# EAGLE board ProtoSnap-Pro_Mini-Panel-v15 (EAGLE 6.5.0), part 1 of 3
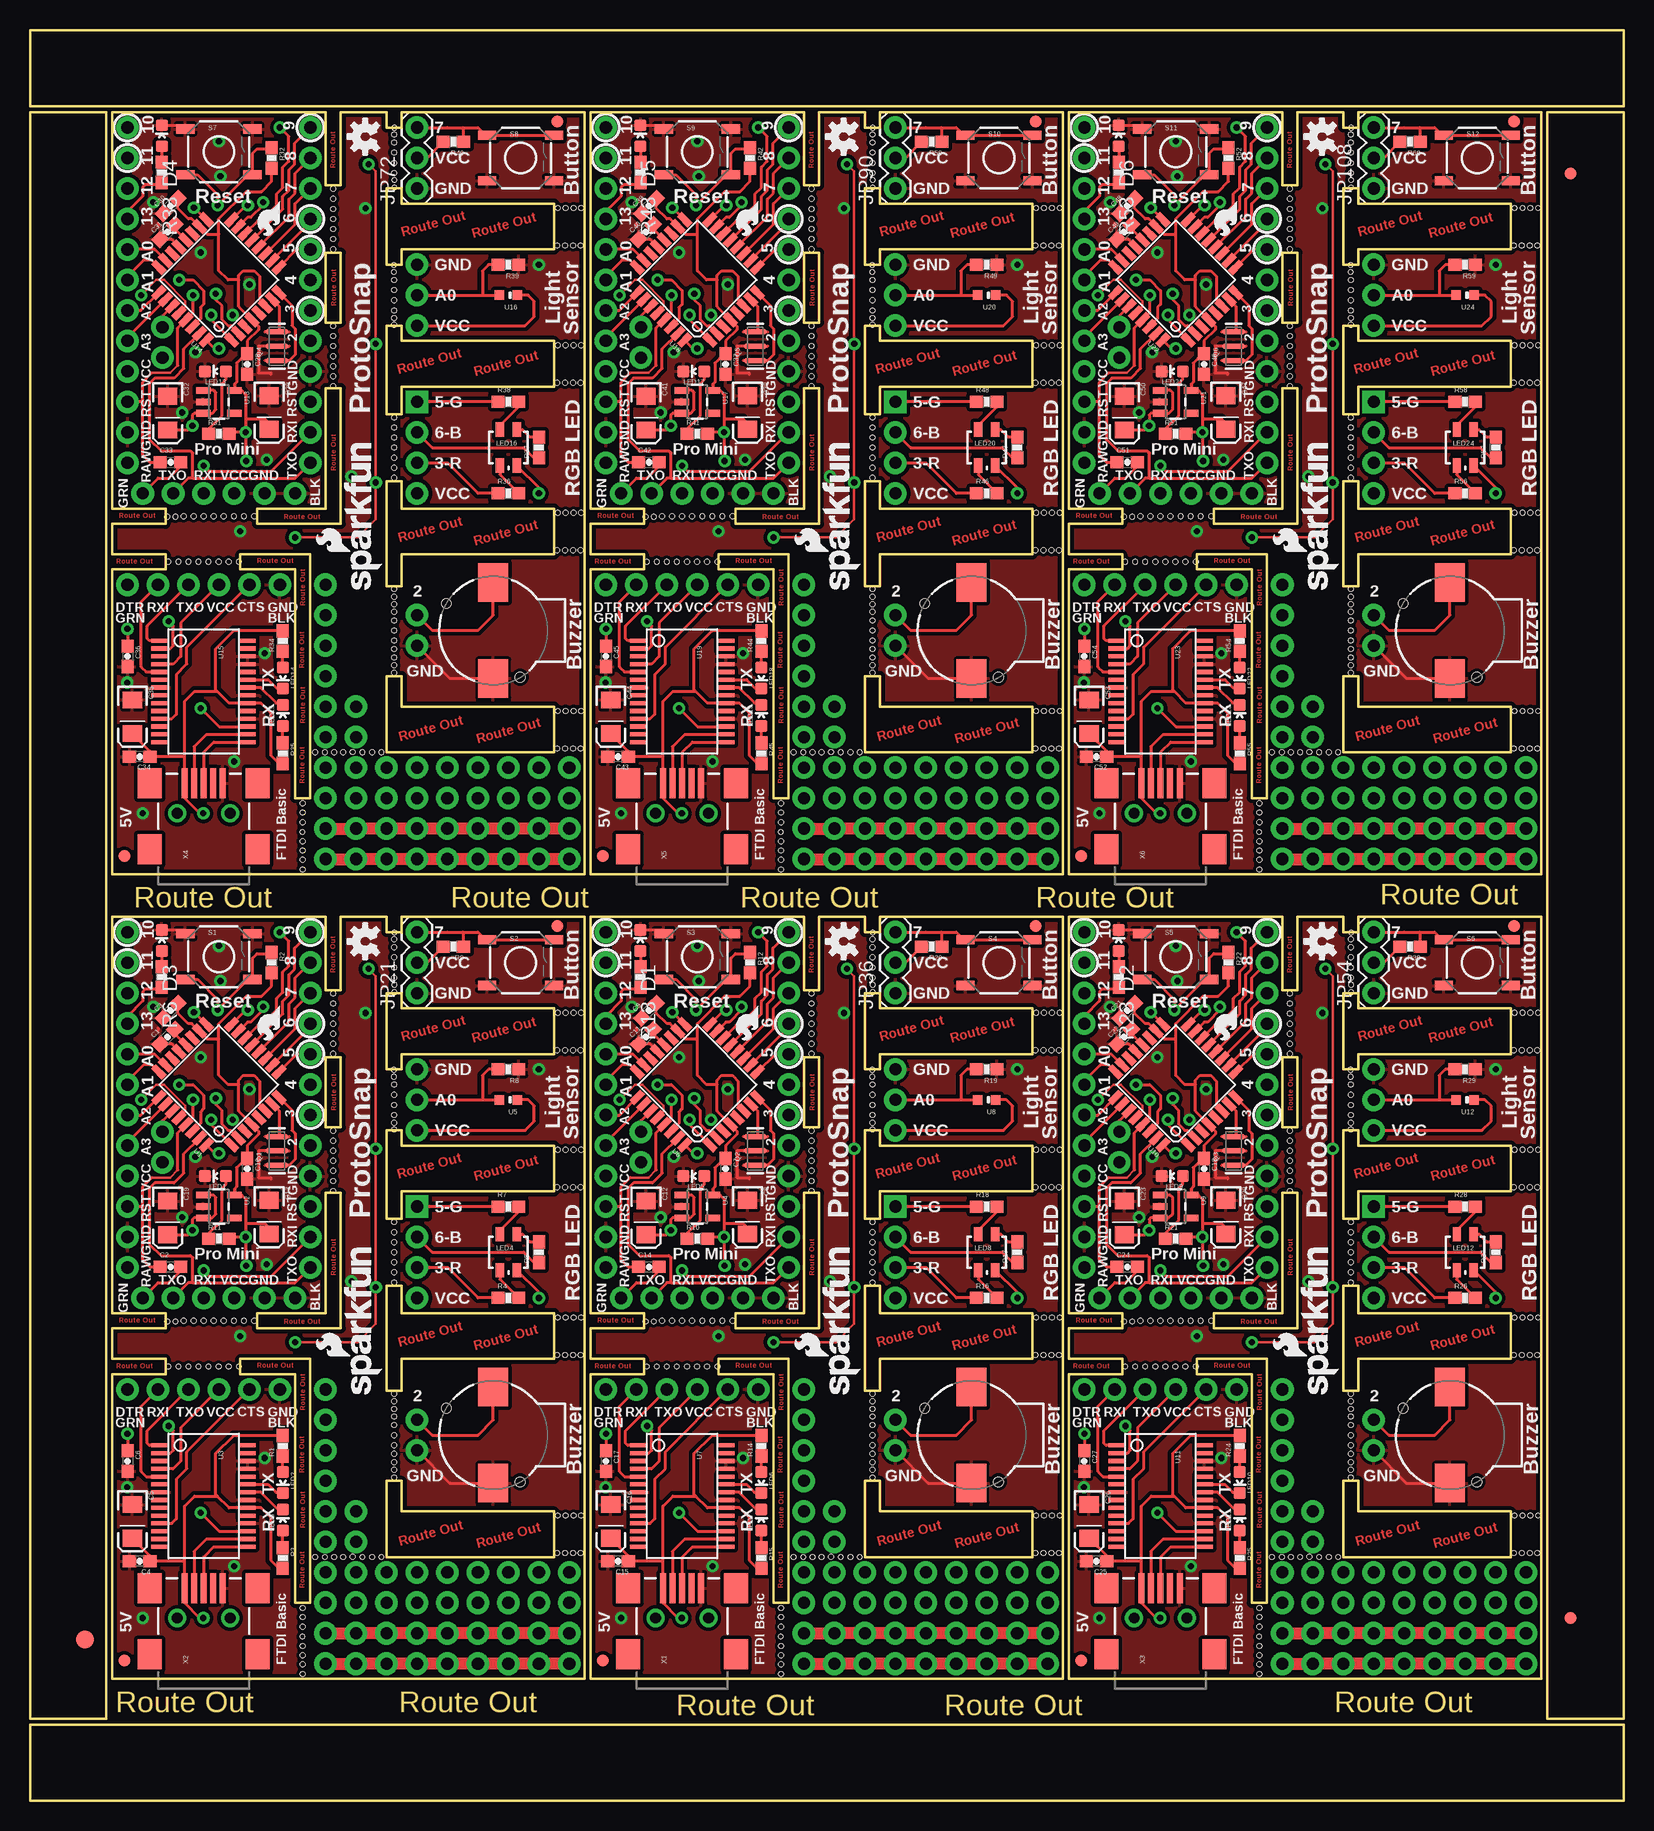
[diagram p0: board, top side]
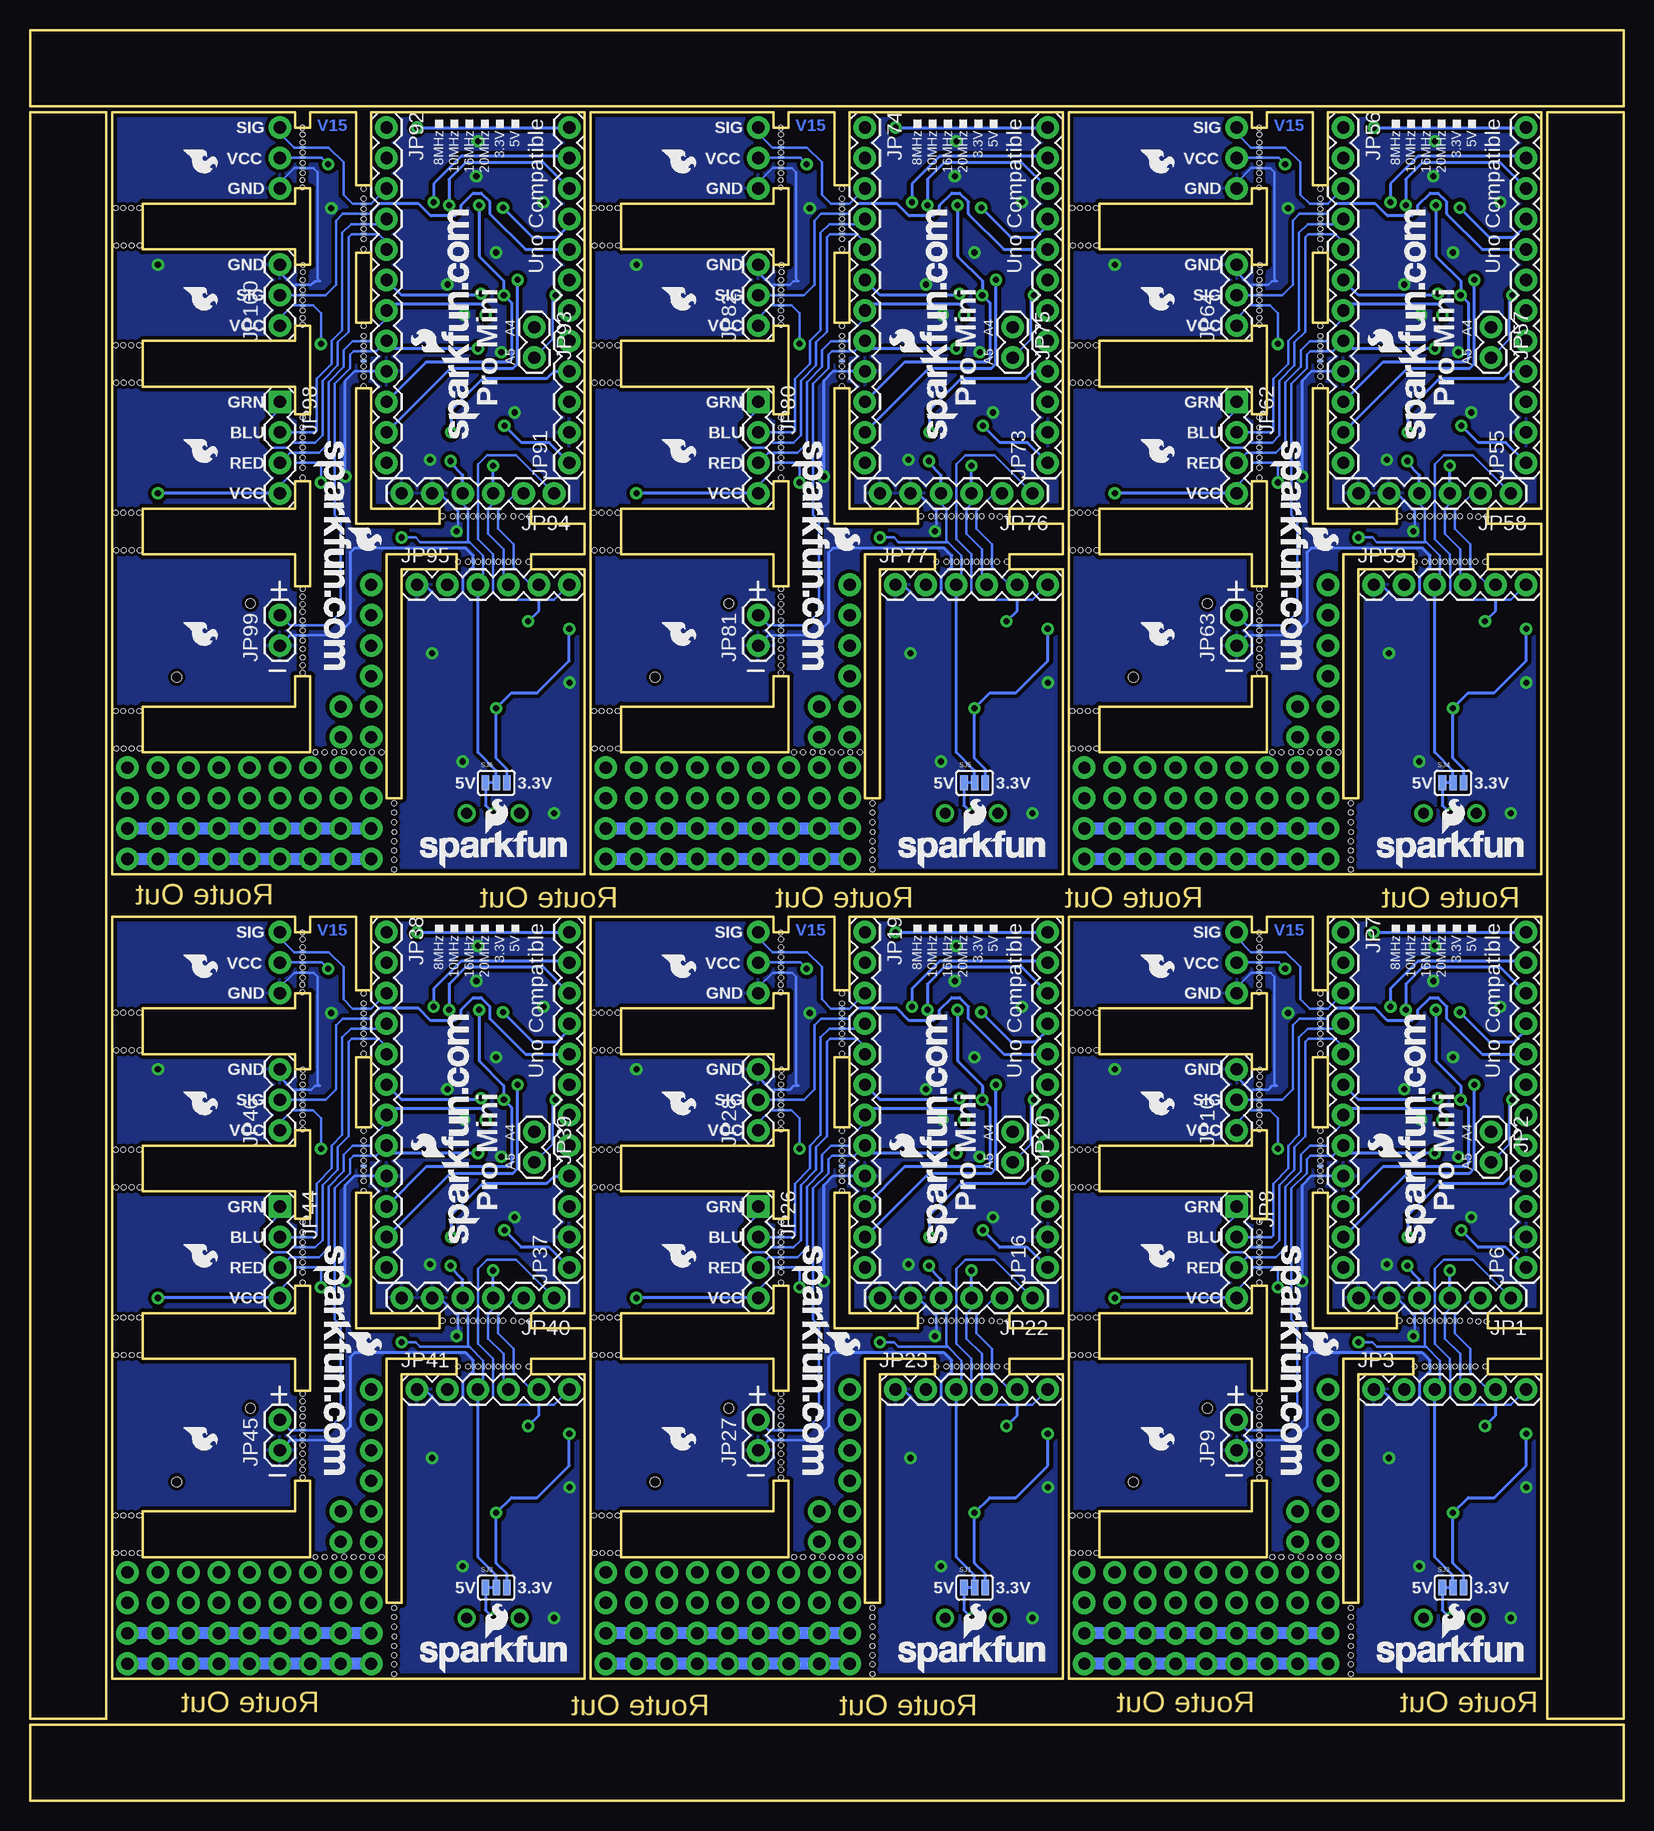
[diagram p1: board, bottom side, seen from below]

Size 132.84 x 147.57 mm. Coordinates in mm from the lower left corner, seen from the top.
Outline: 412 segments
Copper layers (1*16): Top 0.035mm / dielectric 1.5mm / Bottom 0.035mm
Design rules "SparkFun *": minimum track width 8mil, minimum drill 20mil, track to track 8mil, track to pad 8mil, pad to pad 8mil, via to via 8mil, smd to smd 8mil, copper to edge 8mil, drill to drill 8mil, minimum pad ring 12mil, minimum via ring 10mil, stop-mask expansion 4mil, vias tented up to drill 20mil, thermal gap 10mil
Net classes: 0 default: width 0.203 mm; 1 power: width 0.254 mm
Holes 0.38 mm at 26.11,20.32 27.71,20.32 28.52,20.32 26.9,20.35 29.29,20.32 12.12,39.95 11.43,39.95 23.77,20.32 24.59,20.32 25.35,20.32 22.73,12.9 22.73,14.5 22.73,15.32 22.71,13.69 22.73,16.08 22.73,10.57 22.73,11.38 22.73,12.14 30.35,28.93 30.35,28.22 30.35,32.66 30.35,32.03 30.35,56.52 30.35,55.96 30.33,60.35 30.33,60.93 30.38,68.02 30.38,67.39 30.35,71.81 30.38,72.36 30.35,33.93 30.35,33.3 30.35,27.58 30.35,26.95 44.65,65.68 45.31,65.68 45.95,65.68 43.99,65.68 44.6,62.56 45.26,62.56 45.9,62.56 43.94,62.56 44.65,54.25 45.31,54.25 45.95,54.25 43.99,54.25 44.6,51.13 45.26,51.13 45.9,51.13 43.94,51.13 44.65,40.28 45.31,40.28 45.95,40.28 43.99,40.28 44.6,37.16 45.26,37.16 45.9,37.16 43.94,37.16 44.65,23.77 45.31,23.77 45.95,23.77 43.99,23.77 44.6,20.65 45.26,20.65 45.9,20.65 43.94,20.65 65.99,20.32 67.59,20.32 68.4,20.32 66.78,20.35 69.16,20.32 51.99,39.95 51.31,39.95 63.65,20.32 64.47,20.32 65.23,20.32 62.61,12.9 62.61,14.5 62.61,15.32 62.59,13.69 62.61,16.08 62.61,10.57 62.61,11.38 62.61,12.14 70.23,28.93 70.23,28.22 70.23,32.66 70.23,32.03 70.23,56.52 70.23,55.96 70.21,60.35 70.21,60.93 70.26,68.02 70.26,67.39 70.23,71.81 70.26,72.36 70.23,33.93 70.23,33.3 70.23,27.58 70.23,26.95 84.53,65.68 85.19,65.68 85.83,65.68 83.87,65.68 84.48,62.56 85.14,62.56 85.78,62.56 83.82,62.56 84.53,54.25 85.19,54.25 85.83,54.25 83.87,54.25 84.48,51.13 85.14,51.13 85.78,51.13 83.82,51.13 84.53,40.28 85.19,40.28 85.83,40.28 83.87,40.28 84.48,37.16 85.14,37.16 85.78,37.16 83.82,37.16 84.53,23.77 85.19,23.77 85.83,23.77 83.87,23.77 84.48,20.65 85.14,20.65 85.78,20.65 83.82,20.65 105.87,20.32 107.47,20.32 108.28,20.32 106.65,20.35 109.04,20.32 91.87,39.95 91.19,39.95 103.53,20.32 104.34,20.32 105.11,20.32 102.49,12.9 102.49,14.5 102.49,15.32 102.46,13.69 102.49,16.08 102.49,10.57 102.49,11.38 102.49,12.14 110.11,28.93 110.11,28.22 110.11,32.66 110.11,32.03 110.11,56.52 110.11,55.96 110.08,60.35 110.08,60.93 110.13,68.02 110.13,67.39 110.11,71.81 110.13,72.36 110.11,33.93 110.11,33.3 110.11,27.58 110.11,26.95 124.41,65.68 125.07,65.68 125.7,65.68 123.75,65.68 124.36,62.56 125.02,62.56 125.65,62.56 123.7,62.56 124.41,54.25 125.07,54.25 125.7,54.25 123.75,54.25 124.36,51.13 125.02,51.13 125.65,51.13 123.7,51.13 124.41,40.28 125.07,40.28 125.7,40.28 123.75,40.28 124.36,37.16 125.02,37.16 125.65,37.16 123.7,37.16 124.41,23.77 125.07,23.77 125.7,23.77 123.75,23.77 124.36,20.65 125.02,20.65 125.65,20.65 123.7,20.65 26.11,87.38 27.71,87.38 28.52,87.38 26.9,87.4 29.29,87.38 12.12,107.01 11.43,107.01 23.77,87.38 24.59,87.38 25.35,87.38 22.73,79.96 22.73,81.56 22.73,82.37 22.71,80.75 22.73,83.13 22.73,77.62 22.73,78.44 22.73,79.2 30.35,95.99 30.35,95.28 30.35,99.72 30.35,99.09 30.35,123.57 30.35,123.01 30.33,127.41 30.33,127.99 30.38,135.08 30.38,134.44 30.35,138.86 30.38,139.42 30.35,100.99 30.35,100.36 30.35,94.64 30.35,94.01 44.65,132.74 45.31,132.74 45.95,132.74 43.99,132.74 44.6,129.62 45.26,129.62 45.9,129.62 43.94,129.62 44.65,121.31 45.31,121.31 45.95,121.31 43.99,121.31 44.6,118.19 45.26,118.19 45.9,118.19 43.94,118.19 44.65,107.34 45.31,107.34 45.95,107.34 43.99,107.34 44.6,104.22 45.26,104.22 45.9,104.22 43.94,104.22 44.65,90.83 45.31,90.83 45.95,90.83 43.99,90.83 44.6,87.71 45.26,87.71 45.9,87.71 43.94,87.71 65.99,87.38 67.59,87.38 68.4,87.38 66.78,87.4 69.16,87.38 51.99,107.01 51.31,107.01 63.65,87.38 64.47,87.38 65.23,87.38 62.61,79.96 62.61,81.56 62.61,82.37 62.59,80.75 62.61,83.13 62.61,77.62 62.61,78.44 62.61,79.2 70.23,95.99 70.23,95.28 70.23,99.72 70.23,99.09 70.23,123.57 70.23,123.01 70.21,127.41 70.21,127.99 70.26,135.08 70.26,134.44 70.23,138.86 70.26,139.42 70.23,100.99 70.23,100.36 70.23,94.64 70.23,94.01 84.53,132.74 85.19,132.74 85.83,132.74 83.87,132.74 84.48,129.62 85.14,129.62 85.78,129.62 83.82,129.62 84.53,121.31 85.19,121.31 85.83,121.31 83.87,121.31 84.48,118.19 85.14,118.19 85.78,118.19 83.82,118.19 84.53,107.34 85.19,107.34 85.83,107.34 83.87,107.34 84.48,104.22 85.14,104.22 85.78,104.22 83.82,104.22 84.53,90.83 85.19,90.83 85.83,90.83 83.87,90.83 84.48,87.71 85.14,87.71 85.78,87.71 83.82,87.71 105.87,87.38 107.47,87.38 108.28,87.38 106.65,87.4 109.04,87.38 91.87,107.01 91.19,107.01 103.53,87.38 104.34,87.38 105.11,87.38 102.49,79.96 102.49,81.56 102.49,82.37 102.46,80.75 102.49,83.13 102.49,77.62 102.49,78.44 102.49,79.2 110.11,95.99 110.11,95.28 110.11,99.72 110.11,99.09 110.11,123.57 110.11,123.01 110.08,127.41 110.08,127.99 110.13,135.08 110.13,134.44 110.11,138.86 110.13,139.42 110.11,100.99 110.11,100.36 110.11,94.64 110.11,94.01 124.41,132.74 125.07,132.74 125.7,132.74 123.75,132.74 124.36,129.62 125.02,129.62 125.65,129.62 123.7,129.62 124.41,121.31 125.07,121.31 125.7,121.31 123.75,121.31 124.36,118.19 125.02,118.19 125.65,118.19 123.7,118.19 124.41,107.34 125.07,107.34 125.7,107.34 123.75,107.34 124.36,104.22 125.02,104.22 125.65,104.22 123.7,104.22 124.41,90.83 125.07,90.83 125.7,90.83 123.75,90.83 124.36,87.71 125.02,87.71 125.65,87.71 123.7,87.71

## Footprints (pad centres in the part's own frame; a part is rotated, then mirrored left to right if it is on the bottom)
0603-CAP = smd 1.1 x 1: 1 -0.85,0; 2 0.85,0
EIA3216 = smd 1.4 x 1.6: A 1.4,0; C -1.4,0
0603-LED-ALT1 = smd 1 x 1: A 0,-0.877; C 0,0.877
FIDUCIAL-1.5X3 = smd 1.5 x 1.5: 1 0,0
FIDUCIAL-1X2 = smd 1 x 1: 1 0,0
1X06 = drill 1.016 pad 1.88: 1 0,0; 2 2.54,0; 3 5.08,0; 4 7.62,0; 5 10.16,0; 6 12.7,0
1X02 = drill 1.016 pad 1.88: 1 0,0; 2 2.54,0
1X12 = drill 1.016 pad 1.88: 1 0,0; 2 2.54,0; 3 5.08,0; 4 7.62,0; 5 10.16,0; 6 12.7,0; 7 15.24,0; 8 17.78,0; 9 20.32,0; 10 22.86,0; 11 25.4,0; 12 27.94,0
1X04 = drill 1.016 pad 1.88 square: 1 0,0 | drill 1.016 pad 1.88: 2 2.54,0; 3 5.08,0; 4 7.62,0
1X03 = drill 1.016 pad 1.88: 1 0,0; 2 2.54,0; 3 5.08,0
LED-TRICOLOR-SMD = smd 0.7 x 1.2: A 0.7,-1.5; B 0.7,1.5; G -0.7,1.5; R -0.7,-1.5
RESONATOR-SMD-1:1 = smd 0.45 x 1.905: 1 -1.2,0; 2 0,0; 3 1.2,0
0603-RES = smd 1.1 x 1: 1 -0.85,0; 2 0.85,0
TACTILE-SWITCH-SMD-ALT01 = smd 1.524 x 0.762: 1 -2.794,1.905; 2 2.794,1.905; 3 -2.794,-1.905; 4 2.794,-1.905
BUZZER-CCV = smd 3.2 x 2.5: + 4,0; - -4,0 | hole 0.8: -3.9,-2.25; 2.25,3.9
SJ_3 = smd 0.635 x 1.27: 1 -0.889,0; 2 0,0; 3 0.889,0
TQFP32-08 = smd 1.27 x 0.559: 1 -4.293,2.8; 2 -4.293,2; 3 -4.293,1.2; 4 -4.293,0.4; 5 -4.293,-0.4; 6 -4.293,-1.2; 7 -4.293,-2; 8 -4.293,-2.8; 17 4.293,-2.8; 18 4.293,-2; 19 4.293,-1.2; 20 4.293,-0.4; 21 4.293,0.4; 22 4.293,1.2; 23 4.293,2; 24 4.293,2.8 | smd 0.559 x 1.27: 9 -2.8,-4.293; 10 -2,-4.293; 11 -1.2,-4.293; 12 -0.4,-4.293; 13 0.4,-4.293; 14 1.2,-4.293; 15 2,-4.293; 16 2.8,-4.293; 25 2.8,4.293; 26 2,4.293; 27 1.2,4.293; 28 0.4,4.293; 29 -0.4,4.293; 30 -1.2,4.293; 31 -2,4.293; 32 -2.8,4.293
SOT23-5 = smd 0.55 x 1.2: 1 -0.95,-1.3; 2 0,-1.3; 3 0.95,-1.3; 4 0.95,1.3; 5 -0.95,1.3
SSOP28DB = smd 0.348 x 1.397: 1 -4.225,-3.656; 2 -3.575,-3.656; 3 -2.925,-3.656; 4 -2.275,-3.656; 5 -1.625,-3.656; 6 -0.975,-3.656; 7 -0.325,-3.656; 8 0.325,-3.656; 9 0.975,-3.656; 10 1.625,-3.656; 11 2.275,-3.656; 12 2.925,-3.656; 13 3.575,-3.656; 14 4.225,-3.656; 15 4.225,3.656; 16 3.575,3.656; 17 2.925,3.656; 18 2.275,3.656; 19 1.625,3.656; 20 0.975,3.656; 21 0.325,3.656; 22 -0.325,3.656; 23 -0.975,3.656; 24 -1.625,3.656; 25 -2.275,3.656; 26 -2.925,3.656; 27 -3.575,3.656; 28 -4.225,3.656
ALS-PT19 = smd 0.8 x 0.8: C -0.75,0; E 0.75,0
MOUSE-BITE-3 = smd 0.203 x 0.508 bottom: P$1 -0.851,0; P$2 0,0; P$3 0.851,0 | hole 0.381: -1.27,0; -0.432,0; 0.432,0; 1.27,0
MOUSE-BITE-2 = smd 0.203 x 0.508 bottom: P$1 -0.419,0; P$2 0.419,0 | hole 0.381: -0.838,0; 0,0; 0.838,0
MOUSE-BITE-5 = smd 0.203 x 0.508 bottom: P$1 -1.689,0; P$2 -0.851,0; P$3 -0.013,0; P$4 0.826,0; P$5 1.664,0 | hole 0.381: -2.108,0; -1.27,0; -0.432,0; 0.406,0; 1.245,0; 2.083,0; -2.946,0; 2.946,0
MOUSE-BITE-4 = smd 0.203 x 0.508 bottom: P$1 -1.257,0; P$2 -0.419,0; P$3 0.419,0; P$4 1.257,0 | hole 0.381: -1.676,0; -0.838,0; 0,0; 0.838,0; 1.676,0; 2.515,0; -2.515,0
USB-MINIB-NOSTOP = smd 2.5 x 0.5: D+ 2.5,0; D- 2.5,0.8; GND 2.5,-1.6; ID 2.5,-0.8; VBUS 2.5,1.6 | smd 2.5 x 2: G1 -3,-4.5; G2 -3,4.5; G3 2.5,4.5; G4 2.5,-4.5 | drill 0.9 pad 0.8: H1 0,2.2 | drill 0.9 pad 0.787: H2 0,-2.2

## Placement (x,y rotation side)
C1  0.1uF  [0603-CAP]  11.46,63.68 45 top
C2  0.1uF  [0603-CAP]  11.71,44.5 0 top
C3  0.1uF  [0603-CAP]  11.72,65.85 45 top
C4  0.1uF  [0603-CAP]  9.14,19.96 180 top
C5  10uF  [EIA3216]  8.53,23.29 270 top
C6  0.1uF  [0603-CAP]  8.13,28.32 270 top
C7  0.1uF  [0603-CAP]  57.99,52.68 270 top
C8  10uF  [EIA3216]  59.82,48.64 270 top
C9  0.1uF  [0603-CAP]  51.6,65.85 45 top
C10  0.1uF  [0603-CAP]  18.11,52.68 270 top
C11  0.1uF  [0603-CAP]  51.34,63.68 45 top
C12  10uF  [EIA3216]  51.36,48.59 270 top
C13  10uF  [EIA3216]  19.94,48.64 270 top
C14  0.1uF  [0603-CAP]  51.59,44.5 0 top
C15  0.1uF  [0603-CAP]  49.02,19.96 180 top
C16  10uF  [EIA3216]  48.41,23.29 270 top
C17  0.1uF  [0603-CAP]  48.01,28.32 270 top
C18  0.1uF  [0603-CAP]  97.87,52.68 270 top
C19  10uF  [EIA3216]  11.48,48.59 270 top
C20  10uF  [EIA3216]  99.69,48.64 270 top
C21  0.1uF  [0603-CAP]  91.48,65.85 45 top
C22  0.1uF  [0603-CAP]  91.22,63.68 45 top
C23  10uF  [EIA3216]  91.24,48.59 270 top
C24  0.1uF  [0603-CAP]  91.47,44.5 0 top
C25  0.1uF  [0603-CAP]  88.9,19.96 180 top
C26  10uF  [EIA3216]  88.29,23.29 270 top
C27  0.1uF  [0603-CAP]  87.88,28.32 270 top
C28  0.1uF  [0603-CAP]  18.11,119.74 270 top
C29  10uF  [EIA3216]  19.94,115.7 270 top
C30  0.1uF  [0603-CAP]  11.72,132.9 45 top
C31  0.1uF  [0603-CAP]  11.46,130.73 45 top
C32  10uF  [EIA3216]  11.48,115.65 270 top
C33  0.1uF  [0603-CAP]  11.71,111.56 0 top
C34  0.1uF  [0603-CAP]  9.14,87.02 180 top
C35  10uF  [EIA3216]  8.53,90.35 270 top
C36  0.1uF  [0603-CAP]  8.13,95.38 270 top
C37  0.1uF  [0603-CAP]  57.99,119.74 270 top
C38  10uF  [EIA3216]  59.82,115.7 270 top
C39  0.1uF  [0603-CAP]  51.6,132.9 45 top
C40  0.1uF  [0603-CAP]  51.34,130.73 45 top
C41  10uF  [EIA3216]  51.36,115.65 270 top
C42  0.1uF  [0603-CAP]  51.59,111.56 0 top
C43  0.1uF  [0603-CAP]  49.02,87.02 180 top
C44  10uF  [EIA3216]  48.41,90.35 270 top
C45  0.1uF  [0603-CAP]  48.01,95.38 270 top
C46  0.1uF  [0603-CAP]  97.87,119.74 270 top
C47  10uF  [EIA3216]  99.69,115.7 270 top
C48  0.1uF  [0603-CAP]  91.48,132.9 45 top
C49  0.1uF  [0603-CAP]  91.22,130.73 45 top
C50  10uF  [EIA3216]  91.24,115.65 270 top
C51  0.1uF  [0603-CAP]  91.47,111.56 0 top
C52  0.1uF  [0603-CAP]  88.9,87.02 180 top
C53  10uF  [EIA3216]  88.29,90.35 270 top
C54  0.1uF  [0603-CAP]  87.88,95.38 270 top
D1  Green  [0603-LED-ALT1]  50.88,71.7 0 top
D2  Green  [0603-LED-ALT1]  90.75,71.7 0 top
D3  Green  [0603-LED-ALT1]  11,71.7 0 top
D4  Green  [0603-LED-ALT1]  11,138.76 0 top
D5  Green  [0603-LED-ALT1]  50.88,138.76 0 top
D6  Green  [0603-LED-ALT1]  90.75,138.76 0 top
E$1  [FIDUCIAL-1.5X3]  4.57,13.46 0 top
E$3  [FIDUCIAL-1X2]  128.4,15.24 0 top
E$4  [FIDUCIAL-1X2]  128.4,135.64 180 top
FID1  FIDUCIAL1X2  [FIDUCIAL-1X2]  7.87,11.68 0 top
FID2  FIDUCIAL1X2  [FIDUCIAL-1X2]  43.94,72.9 0 top
FID3  FIDUCIAL1X2  [FIDUCIAL-1X2]  47.75,11.68 0 top
FID4  FIDUCIAL1X2  [FIDUCIAL-1X2]  83.82,72.9 0 top
FID5  FIDUCIAL1X2  [FIDUCIAL-1X2]  87.63,11.68 0 top
FID6  FIDUCIAL1X2  [FIDUCIAL-1X2]  123.7,72.9 0 top
FID7  FIDUCIAL1X2  [FIDUCIAL-1X2]  7.87,78.74 0 top
FID8  FIDUCIAL1X2  [FIDUCIAL-1X2]  43.94,139.95 0 top
FID9  FIDUCIAL1X2  [FIDUCIAL-1X2]  47.75,78.74 0 top
FID10  FIDUCIAL1X2  [FIDUCIAL-1X2]  83.82,139.95 0 top
FID11  FIDUCIAL1X2  [FIDUCIAL-1X2]  87.63,78.74 0 top
FID12  FIDUCIAL1X2  [FIDUCIAL-1X2]  123.7,139.95 0 top
JP1  FTDI Basic  [1X06]  9.4,41.91 180 bottom
JP2  [1X02]  11.05,55.75 270 bottom
JP3  [1X06]  20.83,34.29 0 bottom
JP4  LOGO-SFENW2  [SFE-NEW-WEB]  20.57,10.67 0 bottom
JP5  LOGO-SFESK  [SFE-LOGO-FLAME]  15.11,13.59 0 bottom
JP6  [1X12]  8.13,44.45 90 bottom
JP7  [1X12]  23.37,72.39 270 bottom
JP8  [1X04]  32.26,49.53 270 bottom
JP9  [1X02]  32.26,29.21 90 bottom
JP10  [1X03]  32.26,55.88 90 bottom
JP11  LOGO-SFESK  [SFE-LOGO-FLAME]  40.26,31.11 270 bottom
JP12  LOGO-SFENW2  [SFE-NEW-WEB]  29.34,33.91 90 top
JP13  LOGO-SFESK  [SFE-LOGO-FLAME]  40.26,46.35 270 bottom
JP14  LOGO-SFESK  [SFE-LOGO-FLAME]  40.26,70.48 270 bottom
JP15  LOGO-SFESK  [SFE-LOGO-FLAME]  40.26,59.05 270 bottom
JP16  [1X12]  48.01,44.45 90 bottom
JP17  LOGO-SFESK  [SFE-LOGO-FLAME]  26.67,37.08 90 top
JP18  LOGO-SFENEW  [SFE-NEW-WEBLOGO]  29.46,46.23 270 bottom
JP19  [1X12]  63.25,72.39 270 bottom
JP20  [1X02]  50.93,55.75 270 bottom
JP21  [1X03]  32.26,67.31 90 top
JP22  FTDI Basic  [1X06]  49.28,41.91 180 bottom
JP23  [1X06]  60.71,34.29 0 bottom
JP24  LOGO-SFENW2  [SFE-NEW-WEB]  60.45,10.67 0 bottom
JP25  LOGO-SFESK  [SFE-LOGO-FLAME]  54.99,13.59 0 bottom
JP26  [1X04]  72.14,49.53 270 bottom
JP27  [1X02]  72.14,29.21 90 bottom
JP28  [1X03]  72.14,55.88 90 bottom
JP29  LOGO-SFESK  [SFE-LOGO-FLAME]  80.14,31.11 270 bottom
JP30  LOGO-SFESK  [SFE-LOGO-FLAME]  80.14,46.35 270 bottom
JP31  LOGO-SFESK  [SFE-LOGO-FLAME]  80.14,70.48 270 bottom
JP32  LOGO-SFESK  [SFE-LOGO-FLAME]  80.14,59.05 270 bottom
JP33  LOGO-SFENW2  [SFE-NEW-WEB]  69.22,33.91 90 top
JP34  LOGO-SFESK  [SFE-LOGO-FLAME]  66.55,37.08 90 top
JP35  LOGO-SFENEW  [SFE-NEW-WEBLOGO]  69.34,46.23 270 bottom
JP36  [1X03]  72.14,67.31 90 top
JP37  [1X12]  87.88,44.45 90 bottom
JP38  [1X12]  103.12,72.39 270 bottom
JP39  [1X02]  90.81,55.75 270 bottom
JP40  FTDI Basic  [1X06]  89.15,41.91 180 bottom
JP41  [1X06]  100.58,34.29 0 bottom
JP42  LOGO-SFENW2  [SFE-NEW-WEB]  100.33,10.67 0 bottom
JP43  LOGO-SFESK  [SFE-LOGO-FLAME]  94.87,13.59 0 bottom
JP44  [1X04]  112.01,49.53 270 bottom
JP45  [1X02]  112.01,29.21 90 bottom
JP46  [1X03]  112.01,55.88 90 bottom
JP47  LOGO-SFESK  [SFE-LOGO-FLAME]  120.02,31.11 270 bottom
JP48  LOGO-SFESK  [SFE-LOGO-FLAME]  120.02,46.35 270 bottom
JP49  LOGO-SFESK  [SFE-LOGO-FLAME]  120.02,70.48 270 bottom
JP50  LOGO-SFESK  [SFE-LOGO-FLAME]  120.02,59.05 270 bottom
JP51  LOGO-SFENW2  [SFE-NEW-WEB]  109.09,33.91 90 top
JP52  LOGO-SFESK  [SFE-LOGO-FLAME]  106.43,37.08 90 top
JP53  LOGO-SFENEW  [SFE-NEW-WEBLOGO]  109.22,46.23 270 bottom
JP54  [1X03]  112.01,67.31 90 top
JP55  [1X12]  8.13,111.51 90 bottom
JP56  [1X12]  23.37,139.45 270 bottom
JP57  [1X02]  11.05,122.81 270 bottom
JP58  FTDI Basic  [1X06]  9.4,108.97 180 bottom
JP59  [1X06]  20.83,101.35 0 bottom
JP60  LOGO-SFENW2  [SFE-NEW-WEB]  20.57,77.72 0 bottom
JP61  LOGO-SFESK  [SFE-LOGO-FLAME]  15.11,80.64 0 bottom
JP62  [1X04]  32.26,116.59 270 bottom
JP63  [1X02]  32.26,96.27 90 bottom
JP64  [1X03]  32.26,122.94 90 bottom
JP65  LOGO-SFESK  [SFE-LOGO-FLAME]  40.26,98.17 270 bottom
JP66  LOGO-SFESK  [SFE-LOGO-FLAME]  40.26,113.41 270 bottom
JP67  LOGO-SFESK  [SFE-LOGO-FLAME]  40.26,137.54 270 bottom
JP68  LOGO-SFESK  [SFE-LOGO-FLAME]  40.26,126.11 270 bottom
JP69  LOGO-SFENW2  [SFE-NEW-WEB]  29.34,100.97 90 top
JP70  LOGO-SFESK  [SFE-LOGO-FLAME]  26.67,104.14 90 top
JP71  LOGO-SFENEW  [SFE-NEW-WEBLOGO]  29.46,113.28 270 bottom
JP72  [1X03]  32.26,134.37 90 top
JP73  [1X12]  48.01,111.51 90 bottom
JP74  [1X12]  63.25,139.45 270 bottom
JP75  [1X02]  50.93,122.81 270 bottom
JP76  FTDI Basic  [1X06]  49.28,108.97 180 bottom
JP77  [1X06]  60.71,101.35 0 bottom
JP78  LOGO-SFENW2  [SFE-NEW-WEB]  60.45,77.72 0 bottom
JP79  LOGO-SFESK  [SFE-LOGO-FLAME]  54.99,80.64 0 bottom
JP80  [1X04]  72.14,116.59 270 bottom
JP81  [1X02]  72.14,96.27 90 bottom
JP82  [1X03]  72.14,122.94 90 bottom
JP83  LOGO-SFESK  [SFE-LOGO-FLAME]  80.14,98.17 270 bottom
JP84  LOGO-SFESK  [SFE-LOGO-FLAME]  80.14,113.41 270 bottom
JP85  LOGO-SFESK  [SFE-LOGO-FLAME]  80.14,137.54 270 bottom
JP86  LOGO-SFESK  [SFE-LOGO-FLAME]  80.14,126.11 270 bottom
JP87  LOGO-SFENW2  [SFE-NEW-WEB]  69.22,100.97 90 top
JP88  LOGO-SFESK  [SFE-LOGO-FLAME]  66.55,104.14 90 top
JP89  LOGO-SFENEW  [SFE-NEW-WEBLOGO]  69.34,113.28 270 bottom
JP90  [1X03]  72.14,134.37 90 top
JP91  [1X12]  87.88,111.51 90 bottom
JP92  [1X12]  103.12,139.45 270 bottom
JP93  [1X02]  90.81,122.81 270 bottom
JP94  FTDI Basic  [1X06]  89.15,108.97 180 bottom
JP95  [1X06]  100.58,101.35 0 bottom
JP96  LOGO-SFENW2  [SFE-NEW-WEB]  100.33,77.72 0 bottom
JP97  LOGO-SFESK  [SFE-LOGO-FLAME]  94.87,80.64 0 bottom
JP98  [1X04]  112.01,116.59 270 bottom
JP99  [1X02]  112.01,96.27 90 bottom
JP100  [1X03]  112.01,122.94 90 bottom
JP101  LOGO-SFESK  [SFE-LOGO-FLAME]  120.02,98.17 270 bottom
JP102  LOGO-SFESK  [SFE-LOGO-FLAME]  120.02,113.41 270 bottom
JP103  LOGO-SFESK  [SFE-LOGO-FLAME]  120.02,137.54 270 bottom
JP104  LOGO-SFESK  [SFE-LOGO-FLAME]  120.02,126.11 270 bottom
JP105  LOGO-SFENW2  [SFE-NEW-WEB]  109.09,100.97 90 top
JP106  LOGO-SFESK  [SFE-LOGO-FLAME]  106.43,104.14 90 top
JP107  LOGO-SFENEW  [SFE-NEW-WEBLOGO]  109.22,113.28 270 bottom
JP108  [1X03]  112.01,134.37 90 top
LED1  Red  [0603-LED-ALT1]  15.47,52.07 90 top
LED2  Red  [0603-LED-ALT1]  21.08,26.52 180 top
LED3  Green  [0603-LED-ALT1]  21.08,23.39 0 top
LED4  LED-TRICOLOR  [LED-TRICOLOR-SMD]  39.88,45.72 0 top
LED5  Red  [0603-LED-ALT1]  55.35,52.07 90 top
LED6  Red  [0603-LED-ALT1]  60.96,26.52 180 top
LED7  Green  [0603-LED-ALT1]  60.96,23.39 0 top
LED8  LED-TRICOLOR  [LED-TRICOLOR-SMD]  79.76,45.72 0 top
LED9  Red  [0603-LED-ALT1]  95.22,52.07 90 top
LED10  Red  [0603-LED-ALT1]  100.84,26.52 180 top
LED11  Green  [0603-LED-ALT1]  100.84,23.39 0 top
LED12  LED-TRICOLOR  [LED-TRICOLOR-SMD]  119.63,45.72 0 top
LED13  Red  [0603-LED-ALT1]  15.47,119.13 90 top
LED14  Red  [0603-LED-ALT1]  21.08,93.57 180 top
LED15  Green  [0603-LED-ALT1]  21.08,90.45 0 top
LED16  LED-TRICOLOR  [LED-TRICOLOR-SMD]  39.88,112.78 0 top
LED17  Red  [0603-LED-ALT1]  55.35,119.13 90 top
LED18  Red  [0603-LED-ALT1]  60.96,93.57 180 top
LED19  Green  [0603-LED-ALT1]  60.96,90.45 0 top
LED20  LED-TRICOLOR  [LED-TRICOLOR-SMD]  79.76,112.78 0 top
LED21  Red  [0603-LED-ALT1]  95.22,119.13 90 top
LED22  Red  [0603-LED-ALT1]  100.84,93.57 180 top
LED23  Green  [0603-LED-ALT1]  100.84,90.45 0 top
LED24  LED-TRICOLOR  [LED-TRICOLOR-SMD]  119.63,112.78 0 top
LOGO1  OSHW-LOGOS  [OSHW-LOGO-S]  27.94,71.63 90 top
LOGO2  OSHW-LOGOS  [OSHW-LOGO-S]  67.82,71.63 90 top
LOGO3  OSHW-LOGOS  [OSHW-LOGO-S]  107.7,71.63 90 top
LOGO4  OSHW-LOGOS  [OSHW-LOGO-S]  27.94,138.68 90 top
LOGO5  OSHW-LOGOS  [OSHW-LOGO-S]  67.82,138.68 90 top
LOGO6  OSHW-LOGOS  [OSHW-LOGO-S]  107.7,138.68 90 top
Q1  16MHz  [RESONATOR-SMD-1:1]  20.59,54.16 90 top
Q2  16MHz  [RESONATOR-SMD-1:1]  60.47,54.16 90 top
Q3  16MHz  [RESONATOR-SMD-1:1]  100.35,54.16 90 top
Q4  16MHz  [RESONATOR-SMD-1:1]  20.59,121.22 90 top
Q5  16MHz  [RESONATOR-SMD-1:1]  60.47,121.22 90 top
Q6  16MHz  [RESONATOR-SMD-1:1]  100.35,121.22 90 top
R1  1K  [0603-RES]  21.08,29.59 90 top
R2  10K  [0603-RES]  20.14,69.85 270 top
R3  1K  [0603-RES]  21.08,20.24 270 top
R4  200  [0603-RES]  39.88,41.91 0 top
R5  100  [0603-RES]  42.42,45.72 90 top
R6  330  [0603-RES]  11,68.66 90 top
R7  100  [0603-RES]  39.88,49.53 0 top
R8  10k  [0603-RES]  39.88,60.96 180 top
R9  10K  [0603-RES]  35.28,71.2 180 top
R10  10K  [0603-RES]  55.63,46.86 0 top
R11  10K  [0603-RES]  15.75,46.86 0 top
R12  10K  [0603-RES]  60.02,69.85 270 top
R13  330  [0603-RES]  50.88,68.66 90 top
R14  1K  [0603-RES]  60.96,29.59 90 top
R15  1K  [0603-RES]  60.96,20.24 270 top
R16  200  [0603-RES]  79.76,41.91 0 top
R17  100  [0603-RES]  82.3,45.72 90 top
R18  100  [0603-RES]  79.76,49.53 0 top
R19  10k  [0603-RES]  79.76,60.96 180 top
R20  10K  [0603-RES]  75.16,71.2 180 top
R21  10K  [0603-RES]  95.5,46.86 0 top
R22  10K  [0603-RES]  99.9,69.85 270 top
R23  330  [0603-RES]  90.75,68.66 90 top
R24  1K  [0603-RES]  100.84,29.59 90 top
R25  1K  [0603-RES]  100.84,20.24 270 top
R26  200  [0603-RES]  119.63,41.91 0 top
R27  100  [0603-RES]  122.17,45.72 90 top
R28  100  [0603-RES]  119.63,49.53 0 top
R29  10k  [0603-RES]  119.63,60.96 180 top
R30  10K  [0603-RES]  115.04,71.2 180 top
R31  10K  [0603-RES]  15.75,113.92 0 top
R32  10K  [0603-RES]  20.14,136.91 270 top
R33  330  [0603-RES]  11,135.71 90 top
R34  1K  [0603-RES]  21.08,96.65 90 top
R35  1K  [0603-RES]  21.08,87.3 270 top
R36  200  [0603-RES]  39.88,108.97 0 top
R37  100  [0603-RES]  42.42,112.78 90 top
R38  100  [0603-RES]  39.88,116.59 0 top
R39  10k  [0603-RES]  39.88,128.02 180 top
R40  10K  [0603-RES]  35.28,138.25 180 top
R41  10K  [0603-RES]  55.63,113.92 0 top
R42  10K  [0603-RES]  60.02,136.91 270 top
R43  330  [0603-RES]  50.88,135.71 90 top
R44  1K  [0603-RES]  60.96,96.65 90 top
R45  1K  [0603-RES]  60.96,87.3 270 top
R46  200  [0603-RES]  79.76,108.97 0 top
R47  100  [0603-RES]  82.3,112.78 90 top
R48  100  [0603-RES]  79.76,116.59 0 top
R49  10k  [0603-RES]  79.76,128.02 180 top
R50  10K  [0603-RES]  75.16,138.25 180 top
R51  10K  [0603-RES]  95.5,113.92 0 top
R52  10K  [0603-RES]  99.9,136.91 270 top
R53  330  [0603-RES]  90.75,135.71 90 top
R54  1K  [0603-RES]  100.84,96.65 90 top
R55  1K  [0603-RES]  100.84,87.3 270 top
R56  200  [0603-RES]  119.63,108.97 0 top
R57  100  [0603-RES]  122.17,112.78 90 top
R58  100  [0603-RES]  119.63,116.59 0 top
R59  10k  [0603-RES]  119.63,128.02 180 top
R60  10K  [0603-RES]  115.04,138.25 180 top
S1  [TACTILE-SWITCH-SMD-ALT01]  15.75,70.36 0 top
S2  [TACTILE-SWITCH-SMD-ALT01]  40.89,69.85 0 top
S3  [TACTILE-SWITCH-SMD-ALT01]  55.63,70.36 0 top
S4  [TACTILE-SWITCH-SMD-ALT01]  80.77,69.85 0 top
S5  [TACTILE-SWITCH-SMD-ALT01]  95.5,70.36 0 top
S6  [TACTILE-SWITCH-SMD-ALT01]  120.65,69.85 0 top
S7  [TACTILE-SWITCH-SMD-ALT01]  15.75,137.41 0 top
S8  [TACTILE-SWITCH-SMD-ALT01]  40.89,136.91 0 top
S9  [TACTILE-SWITCH-SMD-ALT01]  55.63,137.41 0 top
S10  [TACTILE-SWITCH-SMD-ALT01]  80.77,136.91 0 top
S11  [TACTILE-SWITCH-SMD-ALT01]  95.5,137.41 0 top
S12  [TACTILE-SWITCH-SMD-ALT01]  120.65,136.91 0 top
SG1  BUZZERSMD2  [BUZZER-CCV]  38.61,30.48 90 top
SG2  BUZZERSMD2  [BUZZER-CCV]  78.49,30.48 90 top
SG3  BUZZERSMD2  [BUZZER-CCV]  118.36,30.48 90 top
SG4  BUZZERSMD2  [BUZZER-CCV]  38.61,97.54 90 top
SG5  BUZZERSMD2  [BUZZER-CCV]  78.49,97.54 90 top
SG6  BUZZERSMD2  [BUZZER-CCV]  118.36,97.54 90 top
SJ1  [SJ_3]  54.1,17.78 0 bottom
SJ2  [SJ_3]  14.22,17.78 0 bottom
SJ3  [SJ_3]  93.98,17.78 0 bottom
SJ4  [SJ_3]  14.22,84.84 0 bottom
SJ5  [SJ_3]  54.1,84.84 0 bottom
SJ6  [SJ_3]  93.98,84.84 0 bottom
U1  ATMEGA328  [TQFP32-08]  15.75,59.69 135 top
U2  MIC5205  [SOT23-5]  15.75,49.53 270 top
U3  FT232RLSSOP  [SSOP28DB]  14.48,25.4 270 top
U4  MIC5205  [SOT23-5]  55.63,49.53 270 top
U5  ALS-PT19  [ALS-PT19]  39.88,58.42 180 top
U6  ATMEGA328  [TQFP32-08]  55.63,59.69 135 top
U7  FT232RLSSOP  [SSOP28DB]  54.36,25.4 270 top
U8  ALS-PT19  [ALS-PT19]  79.76,58.42 180 top
U9  MIC5205  [SOT23-5]  95.5,49.53 270 top
U10  ATMEGA328  [TQFP32-08]  95.5,59.69 135 top
U11  FT232RLSSOP  [SSOP28DB]  94.23,25.4 270 top
U12  ALS-PT19  [ALS-PT19]  119.63,58.42 180 top
U13  MIC5205  [SOT23-5]  15.75,116.59 270 top
U14  ATMEGA328  [TQFP32-08]  15.75,126.75 135 top
U15  FT232RLSSOP  [SSOP28DB]  14.48,92.46 270 top
U16  ALS-PT19  [ALS-PT19]  39.88,125.48 180 top
U17  MIC5205  [SOT23-5]  55.63,116.59 270 top
U18  ATMEGA328  [TQFP32-08]  55.63,126.75 135 top
U19  FT232RLSSOP  [SSOP28DB]  54.36,92.46 270 top
U20  ALS-PT19  [ALS-PT19]  79.76,125.48 180 top
U21  MIC5205  [SOT23-5]  95.5,116.59 270 top
U22  ATMEGA328  [TQFP32-08]  95.5,126.75 135 top
U23  FT232RLSSOP  [SSOP28DB]  94.23,92.46 270 top
U24  ALS-PT19  [ALS-PT19]  119.63,125.48 180 top
U$1  LOGO-SFESK  [SFE-LOGO-FLAME]  20.83,66.22 180 top
U$2  MOUSE-BITE-3  [MOUSE-BITE-3]  30.35,69.88 90 top
U$3  LOGO-SFENEW  [SFE-NEW-WEBLOGO]  55.5,46.48 90 bottom
U$4  LOGO-SFESK  [SFE-LOGO-FLAME]  60.71,66.22 180 top
U$5  MOUSE-BITE-2  [MOUSE-BITE-2]  70.23,30.48 270 top
U$6  MOUSE-BITE-5  [MOUSE-BITE-5]  55.63,40.01 0 top
U$7  MOUSE-BITE-2  [MOUSE-BITE-2]  30.35,30.48 270 top
U$8  MOUSE-BITE-4  [MOUSE-BITE-4]  30.35,45.72 90 top
U$9  MOUSE-BITE-3  [MOUSE-BITE-3]  30.35,58.42 90 top
U$10  MOUSE-BITE-5  [MOUSE-BITE-5]  54.36,36.2 0 top
U$11  LOGO-SFENEW  [SFE-NEW-WEBLOGO]  15.62,46.48 90 bottom
U$12  MOUSE-BITE-4  [MOUSE-BITE-4]  70.23,45.72 90 top
U$13  MOUSE-BITE-4  [MOUSE-BITE-4]  25.27,64.77 90 top
U$14  MOUSE-BITE-4  [MOUSE-BITE-4]  25.27,53.34 90 top
U$15  MOUSE-BITE-4  [MOUSE-BITE-4]  65.15,64.77 90 top
U$16  MOUSE-BITE-3  [MOUSE-BITE-3]  70.23,58.42 90 top
U$17  MOUSE-BITE-4  [MOUSE-BITE-4]  65.15,53.34 90 top
U$18  MOUSE-BITE-3  [MOUSE-BITE-3]  70.23,69.88 90 top
U$19  LOGO-SFENEW  [SFE-NEW-WEBLOGO]  95.38,46.48 90 bottom
U$20  LOGO-SFESK  [SFE-LOGO-FLAME]  100.58,66.22 180 top
U$21  MOUSE-BITE-2  [MOUSE-BITE-2]  110.11,30.48 270 top
U$22  MOUSE-BITE-5  [MOUSE-BITE-5]  15.75,40.01 0 top
U$23  MOUSE-BITE-5  [MOUSE-BITE-5]  14.48,36.2 0 top
U$24  MOUSE-BITE-5  [MOUSE-BITE-5]  95.5,40.01 0 top
U$25  MOUSE-BITE-5  [MOUSE-BITE-5]  94.23,36.2 0 top
U$26  MOUSE-BITE-4  [MOUSE-BITE-4]  110.11,45.72 90 top
U$27  MOUSE-BITE-4  [MOUSE-BITE-4]  105.03,64.77 90 top
U$28  MOUSE-BITE-3  [MOUSE-BITE-3]  110.11,58.42 90 top
U$29  MOUSE-BITE-4  [MOUSE-BITE-4]  105.03,53.34 90 top
U$30  MOUSE-BITE-3  [MOUSE-BITE-3]  110.11,69.88 90 top
U$31  LOGO-SFENEW  [SFE-NEW-WEBLOGO]  15.62,113.54 90 bottom
U$32  LOGO-SFESK  [SFE-LOGO-FLAME]  20.83,133.27 180 top
U$33  MOUSE-BITE-2  [MOUSE-BITE-2]  30.35,97.54 270 top
U$34  MOUSE-BITE-5  [MOUSE-BITE-5]  15.75,107.06 0 top
U$35  MOUSE-BITE-5  [MOUSE-BITE-5]  14.48,103.25 0 top
U$36  MOUSE-BITE-4  [MOUSE-BITE-4]  30.35,112.78 90 top
U$37  MOUSE-BITE-4  [MOUSE-BITE-4]  25.27,131.83 90 top
U$38  MOUSE-BITE-3  [MOUSE-BITE-3]  30.35,125.48 90 top
U$39  MOUSE-BITE-4  [MOUSE-BITE-4]  25.27,120.4 90 top
U$40  MOUSE-BITE-3  [MOUSE-BITE-3]  30.35,136.93 90 top
U$41  LOGO-SFENEW  [SFE-NEW-WEBLOGO]  55.5,113.54 90 bottom
U$42  LOGO-SFESK  [SFE-LOGO-FLAME]  60.71,133.27 180 top
U$43  MOUSE-BITE-2  [MOUSE-BITE-2]  70.23,97.54 270 top
U$44  MOUSE-BITE-5  [MOUSE-BITE-5]  55.63,107.06 0 top
U$45  MOUSE-BITE-5  [MOUSE-BITE-5]  54.36,103.25 0 top
U$46  MOUSE-BITE-4  [MOUSE-BITE-4]  70.23,112.78 90 top
U$47  MOUSE-BITE-4  [MOUSE-BITE-4]  65.15,131.83 90 top
U$48  MOUSE-BITE-3  [MOUSE-BITE-3]  70.23,125.48 90 top
U$49  MOUSE-BITE-4  [MOUSE-BITE-4]  65.15,120.4 90 top
U$50  MOUSE-BITE-3  [MOUSE-BITE-3]  70.23,136.93 90 top
U$51  LOGO-SFENEW  [SFE-NEW-WEBLOGO]  95.38,113.54 90 bottom
U$52  LOGO-SFESK  [SFE-LOGO-FLAME]  100.58,133.27 180 top
U$53  MOUSE-BITE-2  [MOUSE-BITE-2]  110.11,97.54 270 top
U$54  MOUSE-BITE-5  [MOUSE-BITE-5]  95.5,107.06 0 top
U$55  MOUSE-BITE-5  [MOUSE-BITE-5]  94.23,103.25 0 top
U$56  MOUSE-BITE-4  [MOUSE-BITE-4]  110.11,112.78 90 top
U$57  MOUSE-BITE-4  [MOUSE-BITE-4]  105.03,131.83 90 top
U$58  MOUSE-BITE-3  [MOUSE-BITE-3]  110.11,125.48 90 top
U$59  MOUSE-BITE-4  [MOUSE-BITE-4]  105.03,120.4 90 top
U$60  MOUSE-BITE-3  [MOUSE-BITE-3]  110.11,136.93 90 top
X1  USB-SMD-NS  [USB-MINIB-NOSTOP]  54.36,15.24 90 top
X2  USB-SMD-NS  [USB-MINIB-NOSTOP]  14.48,15.24 90 top
X3  USB-SMD-NS  [USB-MINIB-NOSTOP]  94.23,15.24 90 top
X4  USB-SMD-NS  [USB-MINIB-NOSTOP]  14.48,82.3 90 top
X5  USB-SMD-NS  [USB-MINIB-NOSTOP]  54.36,82.3 90 top
X6  USB-SMD-NS  [USB-MINIB-NOSTOP]  94.23,82.3 90 top

## Library data of the parts
C1-C54 JP1-JP108 LED4 LED8 LED12 LED16 LED20 LED24 R1-R60 SG1-SG6 SJ1-SJ6 U1-U4 U6 U7 U9-U11 U13-U15 U17-U19 U21-U23 U$1-U$60 X1-X6 = SparkFun
D1-D6 LED1-LED3 LED5-LED7 LED9-LED11 LED13-LED15 LED17-LED19 LED21-LED23 Q1-Q6 S1-S12 = Testing
E$1 = SparkFun-Retired
E$3 E$4 FID1-FID12 LOGO1-LOGO6 = SparkFun-Aesthetics
U5 U8 U12 U16 U20 U24 = SparkFun-Sensors; PROD_ID: IC-11836

## Nets
3.3V [power]: C6.1 SJ2.3 U3.17
3.3V1 [power]: C17.1 SJ1.3 U7.17
3.3V2 [power]: C27.1 SJ3.3 U11.17
3.3V3 [power]: C36.1 SJ4.3 U15.17
3.3V4 [power]: C45.1 SJ5.3 U19.17
3.3V5 [power]: C54.1 SJ6.3 U23.17
5V: C4.1 C5.A R1.2 R3.2 SJ2.1 U3.20 X2.VBUS
5V1: C15.1 C16.A R14.2 R15.2 SJ1.1 U7.20 X1.VBUS
5V2: C25.1 C26.A R24.2 R25.2 SJ3.1 U11.20 X3.VBUS
5V3: C34.1 C35.A R34.2 R35.2 SJ4.1 U15.20 X4.VBUS
5V4: C43.1 C44.A R44.2 R45.2 SJ5.1 U19.20 X5.VBUS
5V5: C52.1 C53.A R54.2 R55.2 SJ6.1 U23.20 X6.VBUS
A0: JP6.8 JP10.2 R8.2 U1.23 U5.E U$9.P$2 U$13.P$3
A1: JP6.7 U1.24
A2: JP6.6 U1.25
A3: JP6.5 U1.26
A4: JP2.1 U1.27
A5: JP2.2 U1.28
A6: JP20.2 U6.28
A7: JP20.1 U6.27
A8: JP16.5 U6.26
A9: JP16.6 U6.25
A10: JP16.7 U6.24
A11: JP16.8 JP28.2 R19.2 U6.23 U8.E U$15.P$3 U$16.P$2
A12: JP39.2 U10.28
A13: JP39.1 U10.27
A14: JP37.5 U10.26
A15: JP37.6 U10.25
A16: JP37.7 U10.24
A17: JP37.8 JP46.2 R29.2 U10.23 U12.E U$27.P$3 U$28.P$2
A18: JP57.2 U14.28
A19: JP57.1 U14.27
A20: JP55.5 U14.26
A21: JP55.6 U14.25
A22: JP55.7 U14.24
A23: JP55.8 JP64.2 R39.2 U14.23 U16.E U$37.P$3 U$38.P$2
A24: JP75.2 U18.28
A25: JP75.1 U18.27
A26: JP73.5 U18.26
A27: JP73.6 U18.25
A28: JP73.7 U18.24
A29: JP73.8 JP82.2 R49.2 U18.23 U20.E U$47.P$3 U$48.P$2
A30: JP93.2 U22.28
A31: JP93.1 U22.27
A32: JP91.5 U22.26
A33: JP91.6 U22.25
A34: JP91.7 U22.24
A35: JP91.8 JP100.2 R59.2 U22.23 U24.E U$57.P$3 U$58.P$2
AREF: C1.2 U1.20
AREF1: C11.2 U6.20
AREF2: C22.2 U10.20
AREF3: C31.2 U14.20
AREF4: C40.2 U18.20
AREF5: C49.2 U22.20
CTS: JP3.2 U3.11
CTS1: JP23.2 U7.11
CTS2: JP41.2 U11.11
CTS3: JP59.2 U15.11
CTS4: JP77.2 U19.11
CTS5: JP95.2 U23.11
D1: JP19.1 U6.13
D2: JP7.8 JP9.2 SG1.+ U1.32 U$7.P$1 U$14.P$3
D3: JP7.7 JP8.3 R4.1 U1.1 U$8.P$2 U$14.P$4
D4: JP7.6 U1.2
D5: JP7.5 JP8.1 R7.1 U1.9 U$8.P$3 U$13.P$1
D6: JP7.4 JP8.2 R5.1 U1.10 U$8.P$4 U$13.P$2
D7: JP7.3 JP21.3 R9.1 S2.1 S2.2 U1.11 U$2.P$3 U$13.P$4
D8: JP7.2 U1.12
D9: JP7.1 U1.13
D10: JP6.12 U1.14
D11: JP19.2 U6.12
D12: JP19.8 JP27.2 SG2.+ U6.32 U$5.P$1 U$17.P$3
D13: JP19.7 JP26.3 R16.1 U6.1 U$12.P$2 U$17.P$4
D14: JP19.6 U6.2
D15: JP19.5 JP26.1 R18.1 U6.9 U$12.P$3 U$15.P$1
D16: JP19.4 JP26.2 R17.1 U6.10 U$12.P$4 U$15.P$2
D17: JP19.3 JP36.3 R20.1 S4.1 S4.2 U6.11 U$15.P$4 U$18.P$3
D18: JP16.12 U6.14
D19: JP38.1 U10.13
D20: JP38.2 U10.12
D21: JP38.8 JP45.2 SG3.+ U10.32 U$21.P$1 U$29.P$3
D22: JP38.7 JP44.3 R26.1 U10.1 U$26.P$2 U$29.P$4
D23: JP38.6 U10.2
D24: JP38.5 JP44.1 R28.1 U10.9 U$26.P$3 U$27.P$1
D25: JP38.4 JP44.2 R27.1 U10.10 U$26.P$4 U$27.P$2
D26: JP38.3 JP54.3 R30.1 S6.1 S6.2 U10.11 U$27.P$4 U$30.P$3
D27: JP37.12 U10.14
D28: JP56.1 U14.13
D29: JP56.2 U14.12
D30: JP56.8 JP63.2 SG4.+ U14.32 U$33.P$1 U$39.P$3
D31: JP56.7 JP62.3 R36.1 U14.1 U$36.P$2 U$39.P$4
D32: JP56.6 U14.2
D33: JP56.5 JP62.1 R38.1 U14.9 U$36.P$3 U$37.P$1
D34: JP56.4 JP62.2 R37.1 U14.10 U$36.P$4 U$37.P$2
D35: JP56.3 JP72.3 R40.1 S8.1 S8.2 U14.11 U$37.P$4 U$40.P$3
D36: JP55.12 U14.14
D37: JP74.1 U18.13
D38: JP74.2 U18.12
D39: JP74.8 JP81.2 SG5.+ U18.32 U$43.P$1 U$49.P$3
D40: JP74.7 JP80.3 R46.1 U18.1 U$46.P$2 U$49.P$4
D41: JP74.6 U18.2
D42: JP74.5 JP80.1 R48.1 U18.9 U$46.P$3 U$47.P$1
D43: JP74.4 JP80.2 R47.1 U18.10 U$46.P$4 U$47.P$2
D44: JP74.3 JP90.3 R50.1 S10.1 S10.2 U18.11 U$47.P$4 U$50.P$3
D45: JP73.12 U18.14
D46: JP92.1 U22.13
D47: JP92.2 U22.12
D48: JP92.8 JP99.2 SG6.+ U22.32 U$53.P$1 U$59.P$3
D49: JP92.7 JP98.3 R56.1 U22.1 U$56.P$2 U$59.P$4
D50: JP92.6 U22.2
D51: JP92.5 JP98.1 R58.1 U22.9 U$56.P$3 U$57.P$1
D52: JP92.4 JP98.2 R57.1 U22.10 U$56.P$4 U$57.P$2
D53: JP92.3 JP108.3 R60.1 S12.1 S12.2 U22.11 U$57.P$4 U$60.P$3
D54: JP91.12 U22.14
DTR: C2.2 JP1.1 JP3.6 U3.2 U$22.P$3 U$23.P$3
DTR1: C14.2 JP22.1 JP23.6 U7.2 U$6.P$3 U$10.P$3
DTR2: C24.2 JP40.1 JP41.6 U11.2 U$24.P$3 U$25.P$3
DTR3: C33.2 JP58.1 JP59.6 U15.2 U$34.P$3 U$35.P$3
DTR4: C42.2 JP76.1 JP77.6 U19.2 U$44.P$3 U$45.P$3
DTR5: C51.2 JP94.1 JP95.6 U23.2 U$54.P$3 U$55.P$3
GND [power]: C1.1 C3.1 C4.2 C5.C C6.2 C10.2 C13.C C19.C D3.C JP1.5 JP1.6 JP3.1 JP6.2 JP7.9 JP9.1 JP10.3 JP21.1 LED1.C Q1.2 R8.1 S1.1 S1.2 S2.3 S2.4 SG1.- U1.3 U1.5 U1.21 U2.2 U3.7 U3.18 U3.21 U3.25 U3.26 U$2.P$1 U$7.P$2 U$9.P$3 U$14.P$1 U$22.P$5 U$23.P$5 X2.GND
GND1 [power]: C7.2 C8.C C9.1 C11.1 C12.C C15.2 C16.C C17.2 D1.C JP16.2 JP19.9 JP22.5 JP22.6 JP23.1 JP27.1 JP28.3 JP36.1 LED5.C Q2.2 R19.1 S3.1 S3.2 S4.3 S4.4 SG2.- U4.2 U6.3 U6.5 U6.21 U7.7 U7.18 U7.21 U7.25 U7.26 U$5.P$2 U$6.P$5 U$10.P$5 U$16.P$3 U$17.P$1 U$18.P$1 X1.GND
GND2 [power]: C18.2 C20.C C21.1 C22.1 C23.C C25.2 C26.C C27.2 D2.C JP37.2 JP38.9 JP40.5 JP40.6 JP41.1 JP45.1 JP46.3 JP54.1 LED9.C Q3.2 R29.1 S5.1 S5.2 S6.3 S6.4 SG3.- U9.2 U10.3 U10.5 U10.21 U11.7 U11.18 U11.21 U11.25 U11.26 U$21.P$2 U$24.P$5 U$25.P$5 U$28.P$3 U$29.P$1 U$30.P$1 X3.GND
GND3 [power]: C28.2 C29.C C30.1 C31.1 C32.C C34.2 C35.C C36.2 D4.C JP55.2 JP56.9 JP58.5 JP58.6 JP59.1 JP63.1 JP64.3 JP72.1 LED13.C Q4.2 R39.1 S7.1 S7.2 S8.3 S8.4 SG4.- U13.2 U14.3 U14.5 U14.21 U15.7 U15.18 U15.21 U15.25 U15.26 U$33.P$2 U$34.P$5 U$35.P$5 U$38.P$3 U$39.P$1 U$40.P$1 X4.GND
GND4 [power]: C37.2 C38.C C39.1 C40.1 C41.C C43.2 C44.C C45.2 D5.C JP73.2 JP74.9 JP76.5 JP76.6 JP77.1 JP81.1 JP82.3 JP90.1 LED17.C Q5.2 R49.1 S9.1 S9.2 S10.3 S10.4 SG5.- U17.2 U18.3 U18.5 U18.21 U19.7 U19.18 U19.21 U19.25 U19.26 U$43.P$2 U$44.P$5 U$45.P$5 U$48.P$3 U$49.P$1 U$50.P$1 X5.GND
GND5 [power]: C46.2 C47.C C48.1 C49.1 C50.C C52.2 C53.C C54.2 D6.C JP91.2 JP92.9 JP94.5 JP94.6 JP95.1 JP99.1 JP100.3 JP108.1 LED21.C Q6.2 R59.1 S11.1 S11.2 S12.3 S12.4 SG6.- U21.2 U22.3 U22.5 U22.21 U23.7 U23.18 U23.21 U23.25 U23.26 U$53.P$2 U$54.P$5 U$55.P$5 U$58.P$3 U$59.P$1 U$60.P$1 X6.GND
MISO: JP6.10 U1.16
MISO1: JP16.10 U6.16
MISO2: JP37.10 U10.16
MISO3: JP55.10 U14.16
MISO4: JP73.10 U18.16
MISO5: JP91.10 U22.16
MOSI: JP6.11 U1.15
MOSI1: JP16.11 U6.15
MOSI2: JP37.11 U10.15
MOSI3: JP55.11 U14.15
MOSI4: JP73.11 U18.15
MOSI5: JP91.11 U22.15
N$1: Q1.1 U1.8
N$2: Q1.3 U1.7
N$3: LED2.A R1.1
N$4: LED3.A R3.1
N$6: LED4.R R4.2
N$7: D3.A R6.2
N$8: LED4.B R5.2
N$9: LED4.G R7.2
N$26: LED5.A R10.1
N$35: D1.A R13.2
N$36: Q2.1 U6.8
N$37: Q2.3 U6.7
N$38: LED1.A R11.1
N$39: LED6.A R14.1
N$40: LED7.A R15.1
N$42: LED8.R R16.2
N$43: LED8.B R17.2
N$44: LED8.G R18.2
N$69: LED9.A R21.1
N$70: D2.A R23.2
N$71: Q3.1 U10.8
N$72: Q3.3 U10.7
N$73: LED10.A R24.1
N$74: LED11.A R25.1
N$76: LED12.R R26.2
N$77: LED12.B R27.2
N$78: LED12.G R28.2
N$103: LED13.A R31.1
N$104: D4.A R33.2
N$105: Q4.1 U14.8
N$106: Q4.3 U14.7
N$107: LED14.A R34.1
N$108: LED15.A R35.1
N$110: LED16.R R36.2
N$111: LED16.B R37.2
N$112: LED16.G R38.2
N$137: LED17.A R41.1
N$138: D5.A R43.2
N$139: Q5.1 U18.8
N$140: Q5.3 U18.7
N$141: LED18.A R44.1
N$142: LED19.A R45.1
N$144: LED20.R R46.2
N$145: LED20.B R47.2
N$146: LED20.G R48.2
N$171: LED21.A R51.1
N$172: D6.A R53.2
N$173: Q6.1 U22.8
N$174: Q6.3 U22.7
N$175: LED22.A R54.1
N$176: LED23.A R55.1
N$178: LED24.R R56.2
N$179: LED24.B R57.2
N$180: LED24.G R58.2
RAW [power]: C19.A JP6.1 U2.1 U2.3
RAW1 [power]: C12.A JP16.1 U4.1 U4.3
RAW2 [power]: C23.A JP37.1 U9.1 U9.3
RAW3 [power]: C32.A JP55.1 U13.1 U13.3
RAW4 [power]: C41.A JP73.1 U17.1 U17.3
RAW5 [power]: C50.A JP91.1 U21.1 U21.3
RESET: C2.1 JP6.3 JP7.10 R2.1 S1.3 S1.4 U1.29
RESET1: C14.1 JP16.3 JP19.10 R12.1 S3.3 S3.4 U6.29
RESET2: C24.1 JP37.3 JP38.10 R22.1 S5.3 S5.4 U10.29
RESET3: C33.1 JP55.3 JP56.10 R32.1 S7.3 S7.4 U14.29
RESET4: C42.1 JP73.3 JP74.10 R42.1 S9.3 S9.4 U18.29
RESET5: C51.1 JP91.3 JP92.10 R52.1 S11.3 S11.4 U22.29
RX-I: JP1.2 JP3.5 JP7.12 U1.31 U3.5 U$22.P$1 U$23.P$1
RX-I1: JP19.12 JP22.2 JP23.5 U6.31 U7.5 U$6.P$1 U$10.P$1
RX-I2: JP38.12 JP40.2 JP41.5 U10.31 U11.5 U$24.P$1 U$25.P$1
RX-I3: JP56.12 JP58.2 JP59.5 U14.31 U15.5 U$34.P$1 U$35.P$1
RX-I4: JP74.12 JP76.2 JP77.5 U18.31 U19.5 U$44.P$1 U$45.P$1
RX-I5: JP92.12 JP94.2 JP95.5 U22.31 U23.5 U$54.P$1 U$55.P$1
RXLED: LED3.C U3.22
RXLED1: LED7.C U7.22
RXLED2: LED11.C U11.22
RXLED3: LED15.C U15.22
RXLED4: LED19.C U19.22
RXLED5: LED23.C U23.22
SCK: JP6.9 R6.1 U1.17
SCK1: JP16.9 R13.1 U6.17
SCK2: JP37.9 R23.1 U10.17
SCK3: JP55.9 R33.1 U14.17
SCK4: JP73.9 R43.1 U18.17
SCK5: JP91.9 R53.1 U22.17
TX-O: JP1.3 JP3.4 JP7.11 U1.30 U3.1 U$22.P$2 U$23.P$2
TX-O1: JP19.11 JP22.3 JP23.4 U6.30 U7.1 U$6.P$2 U$10.P$2
TX-O2: JP38.11 JP40.3 JP41.4 U10.30 U11.1 U$24.P$2 U$25.P$2
TX-O3: JP56.11 JP58.3 JP59.4 U14.30 U15.1 U$34.P$2 U$35.P$2
TX-O4: JP74.11 JP76.3 JP77.4 U18.30 U19.1 U$44.P$2 U$45.P$2
TX-O5: JP92.11 JP94.3 JP95.4 U22.30 U23.1 U$54.P$2 U$55.P$2
TXLED: LED2.C U3.23
TXLED1: LED6.C U7.23
TXLED2: LED10.C U11.23
TXLED3: LED14.C U15.23
TXLED4: LED18.C U19.23
TXLED5: LED22.C U23.23
USB_D+: U3.15 X2.D+
USB_D+1: U7.15 X1.D+
USB_D+2: U11.15 X3.D+
USB_D+3: U15.15 X4.D+
USB_D+4: U19.15 X5.D+
USB_D+5: U23.15 X6.D+
USB_D-: U3.16 X2.D-
USB_D-1: U7.16 X1.D-
USB_D-2: U11.16 X3.D-
USB_D-3: U15.16 X4.D-
USB_D-4: U19.16 X5.D-
USB_D-5: U23.16 X6.D-
VCC: C3.2 C10.1 C13.A JP1.4 JP3.3 JP6.4 JP8.4 JP10.1 JP21.2 LED4.A R2.2 R9.2 R11.2 SJ2.2 U1.4 U1.6 U1.18 U2.5 U3.4 U5.C U$2.P$2 U$8.P$1 U$9.P$1 U$22.P$4 U$23.P$4
VCC1: C7.1 C8.A C9.2 JP16.4 JP22.4 JP23.3 JP26.4 JP28.1 JP36.2 LED8.A R10.2 R12.2 R20.2 SJ1.2 U4.5 U6.4 U6.6 U6.18 U7.4 U8.C U$6.P$4 U$10.P$4 U$12.P$1 U$16.P$1 U$18.P$2
VCC2: C18.1 C20.A C21.2 JP37.4 JP40.4 JP41.3 JP44.4 JP46.1 JP54.2 LED12.A R21.2 R22.2 R30.2 SJ3.2 U9.5 U10.4 U10.6 U10.18 U11.4 U12.C U$24.P$4 U$25.P$4 U$26.P$1 U$28.P$1 U$30.P$2
VCC3: C28.1 C29.A C30.2 JP55.4 JP58.4 JP59.3 JP62.4 JP64.1 JP72.2 LED16.A R31.2 R32.2 R40.2 SJ4.2 U13.5 U14.4 U14.6 U14.18 U15.4 U16.C U$34.P$4 U$35.P$4 U$36.P$1 U$38.P$1 U$40.P$2
VCC4: C37.1 C38.A C39.2 JP73.4 JP76.4 JP77.3 JP80.4 JP82.1 JP90.2 LED20.A R41.2 R42.2 R50.2 SJ5.2 U17.5 U18.4 U18.6 U18.18 U19.4 U20.C U$44.P$4 U$45.P$4 U$46.P$1 U$48.P$1 U$50.P$2
VCC5: C46.1 C47.A C48.2 JP91.4 JP94.4 JP95.3 JP98.4 JP100.1 JP108.2 LED24.A R51.2 R52.2 R60.2 SJ6.2 U21.5 U22.4 U22.6 U22.18 U23.4 U24.C U$54.P$4 U$55.P$4 U$56.P$1 U$58.P$1 U$60.P$2

## Tracks (layer width: path | path; a pad name or v marks a point on that pad's centre or on a via)
3.3V  (via drill 0.51)
  Top 0.254: U3.17 15.75,22.48 v14.22,24 | v8.13,30.61 C6.1
  Bottom 0.254: SJ2.3 13.34,18.92 14.22,19.81 v14.22,24 12.95,25.27 10.79,25.27 8.13,27.94 v8.13,30.61
3.3V1  (via drill 0.51)
  Top 0.254: U7.17 55.63,22.48 v54.1,24 | v48.01,30.61 C17.1
  Bottom 0.254: SJ1.3 53.21,18.92 54.1,19.81 v54.1,24 52.83,25.27 50.67,25.27 48.01,27.94 v48.01,30.61
3.3V2  (via drill 0.51)
  Top 0.254: U11.17 95.51,22.48 v93.98,24 | v87.88,30.61 C27.1
  Bottom 0.254: SJ3.3 93.09,18.92 93.98,19.81 v93.98,24 92.71,25.27 90.55,25.27 87.88,27.94 v87.88,30.61
3.3V3  (via drill 0.51)
  Top 0.254: U15.17 15.75,89.53 v14.22,91.06 | v8.13,97.66 C36.1
  Bottom 0.254: SJ4.3 13.34,85.98 14.22,86.87 v14.22,91.06 12.95,92.33 10.79,92.33 8.13,95 v8.13,97.66
3.3V4  (via drill 0.51)
  Top 0.254: U19.17 55.63,89.53 v54.1,91.06 | v48.01,97.66 C45.1
  Bottom 0.254: SJ5.3 53.21,85.98 54.1,86.87 v54.1,91.06 52.83,92.33 50.67,92.33 48.01,95 v48.01,97.66
3.3V5  (via drill 0.51)
  Top 0.254: U23.17 95.51,89.53 v93.98,91.06 | v87.88,97.66 C54.1
  Bottom 0.254: SJ6.3 93.09,85.98 93.98,86.87 v93.98,91.06 92.71,92.33 90.55,92.33 87.88,95 v87.88,97.66
5V  (via drill 0.51)
  Top 0.254: 15.62,25.4 16.6,24.43 U3.20 19.26,24.43 20.07,23.62 20.07,20.07 20.74,19.39 R3.2 | 15.62,25.4 15.49,25.53 15.49,28.96 16.98,30.44 R1.2 | 12.88,17.78 X2.VBUS | X2.VBUS 12.88,16.51 14.15,15.24 v14.45,15.24 | 12.88,19.96 C4.1 9.99,20.43 C5.A | X2.VBUS 12.88,19.96 | 12.88,19.96 12.88,24.56 13.72,25.4 15.62,25.4
  Bottom 0.254: SJ2.1 15.11,15.9 v14.45,15.24
5V1  (via drill 0.51)
  Top 0.254: 55.5,25.4 56.47,24.43 U7.20 59.14,24.43 59.94,23.62 59.94,20.07 60.62,19.39 R15.2 | 55.5,25.4 55.37,25.53 55.37,28.96 56.86,30.44 R14.2 | 52.76,17.78 X1.VBUS | X1.VBUS 52.76,16.51 54.03,15.24 v54.33,15.24 | 52.76,19.96 C15.1 49.87,20.43 C16.A | X1.VBUS 52.76,19.96 | 52.76,19.96 52.76,24.56 53.59,25.4 55.5,25.4
  Bottom 0.254: SJ1.1 54.99,15.9 v54.33,15.24
5V2  (via drill 0.51)
  Top 0.254: 95.38,25.4 96.35,24.43 U11.20 99.02,24.43 99.82,23.62 99.82,20.07 100.49,19.39 R25.2 | 95.38,25.4 95.25,25.53 95.25,28.96 96.73,30.44 R24.2 | 92.63,17.78 X3.VBUS | X3.VBUS 92.63,16.51 93.9,15.24 v94.21,15.24 | 92.63,19.96 C25.1 89.75,20.43 C26.A | X3.VBUS 92.63,19.96 | 92.63,19.96 92.63,24.56 93.47,25.4 95.38,25.4
  Bottom 0.254: SJ3.1 94.87,15.9 v94.21,15.24
5V3  (via drill 0.51)
  Top 0.254: 15.62,92.46 16.6,91.48 U15.20 19.26,91.48 20.07,90.68 20.07,87.12 20.74,86.45 R35.2 | 15.62,92.46 15.49,92.58 15.49,96.01 16.98,97.5 R34.2 | 12.88,84.84 X4.VBUS | X4.VBUS 12.88,83.57 14.15,82.3 v14.45,82.3 | 12.88,87.02 C34.1 9.99,87.49 C35.A | X4.VBUS 12.88,87.02 | 12.88,87.02 12.88,91.62 13.72,92.46 15.62,92.46
  Bottom 0.254: SJ4.1 15.11,82.96 v14.45,82.3
5V4  (via drill 0.51)
  Top 0.254: 55.5,92.46 56.47,91.48 U19.20 59.14,91.48 59.94,90.68 59.94,87.12 60.62,86.45 R45.2 | 55.5,92.46 55.37,92.58 55.37,96.01 56.86,97.5 R44.2 | 52.76,84.84 X5.VBUS | X5.VBUS 52.76,83.57 54.03,82.3 v54.33,82.3 | 52.76,87.02 C43.1 49.87,87.49 C44.A | X5.VBUS 52.76,87.02 | 52.76,87.02 52.76,91.62 53.59,92.46 55.5,92.46
  Bottom 0.254: SJ5.1 54.99,82.96 v54.33,82.3
5V5  (via drill 0.51)
  Top 0.254: 95.38,92.46 96.35,91.48 U23.20 99.02,91.48 99.82,90.68 99.82,87.12 100.49,86.45 R55.2 | 95.38,92.46 95.25,92.58 95.25,96.01 96.73,97.5 R54.2 | 92.63,84.84 X6.VBUS | X6.VBUS 92.63,83.57 93.9,82.3 v94.21,82.3 | 92.63,87.02 C52.1 89.75,87.49 C53.A | X6.VBUS 92.63,87.02 | 92.63,87.02 92.63,91.62 93.47,92.46 95.38,92.46
  Bottom 0.254: SJ6.1 94.87,82.96 v94.21,82.3
A0
  Top 0.254: JP10.2 37.72,58.42 | 37.72,58.42 U5.E | U1.23 10.38,62.23 JP6.8 | R8.2 38.23,60.96 37.72,60.45 37.72,58.42
  Bottom 0.203: JP10.2 U$9.P$2 28.45,58.42 27.56,59.31 27.56,64.64 27.01,65.19 U$13.P$3 24.79,65.19 23.94,66.04
  Bottom 0.254: 23.94,66.04 20.7,66.04 19.68,65.02 17.65,65.02 17.14,65.53 17.14,65.91 16.13,66.93 15.47,66.93 14.73,66.19 14.73,65.18 11.79,62.23 JP6.8
A1
  Top 0.254: U1.24 10.14,61.34 9.47,61.34 8.13,59.99 JP6.7
A2
  Top 0.254: U1.25 9.25,57.15 JP6.6
A3
  Top 0.254: 8.13,54.9 JP6.5 8.13,54.9 | U1.26 8.13,54.9
A4
  Top 0.254: JP2.1 11.05,56.69 | 11.05,56.69 | 11.05,56.69 U1.27
A5  (via drill 0.51)
  Top 0.203: 12.95,57.46 12.95,57.91 11.18,59.69 10.54,59.69 v9.27,58.42
  Top 0.254: 12.95,57.46 | 12.95,57.46 U1.28
  Bottom 0.203: v9.27,58.42 9.53,58.17 9.53,54.74 JP2.2
A6  (via drill 0.51)
  Top 0.203: 52.83,57.46 52.83,57.91 51.05,59.69 50.42,59.69 v49.15,58.42
  Top 0.254: 52.83,57.46 | 52.83,57.46 U6.28
  Bottom 0.203: v49.15,58.42 49.4,58.17 49.4,54.74 JP20.2
A7
  Top 0.254: JP20.1 50.93,56.69 | 50.93,56.69 | 50.93,56.69 U6.27
A8
  Top 0.254: 48.01,54.9 JP16.5 48.01,54.9 | U6.26 48.01,54.9
A9
  Top 0.254: U6.25 49.13,57.15 JP16.6
A10
  Top 0.254: U6.24 50.02,61.34 49.35,61.34 48.01,59.99 JP16.7
A11
  Top 0.254: JP28.2 77.6,58.42 | 77.6,58.42 U8.E | U6.23 50.26,62.23 JP16.8 | R19.2 78.11,60.96 77.6,60.45 77.6,58.42
  Bottom 0.203: JP28.2 U$16.P$2 68.33,58.42 67.44,59.31 67.44,64.64 66.89,65.19 U$15.P$3 64.67,65.19 63.82,66.04
  Bottom 0.254: 63.82,66.04 60.58,66.04 59.56,65.02 57.53,65.02 57.02,65.53 57.02,65.91 56.01,66.93 55.35,66.93 54.61,66.19 54.61,65.18 51.66,62.23 JP16.8
A12  (via drill 0.51)
  Top 0.203: 92.71,57.46 92.71,57.91 90.93,59.69 90.3,59.69 v89.03,58.42
  Top 0.254: 92.71,57.46 | 92.71,57.46 U10.28
  Bottom 0.203: v89.03,58.42 89.28,58.17 89.28,54.74 JP39.2
A13
  Top 0.254: JP39.1 90.81,56.69 | 90.81,56.69 | 90.81,56.69 U10.27
A14
  Top 0.254: 87.88,54.9 JP37.5 87.88,54.9 | U10.26 87.88,54.9
A15
  Top 0.254: U10.25 89,57.15 JP37.6
A16
  Top 0.254: U10.24 89.89,61.34 89.23,61.34 87.88,59.99 JP37.7
A17
  Top 0.254: JP46.2 117.47,58.42 | 117.47,58.42 U12.E | U10.23 90.14,62.23 JP37.8 | R29.2 117.98,60.96 117.47,60.45 117.47,58.42
  Bottom 0.203: JP46.2 U$28.P$2 108.2,58.42 107.31,59.31 107.31,64.64 106.77,65.19 U$27.P$3 104.55,65.19 103.7,66.04
  Bottom 0.254: 103.7,66.04 100.46,66.04 99.44,65.02 97.41,65.02 96.9,65.53 96.9,65.91 95.89,66.93 95.22,66.93 94.49,66.19 94.49,65.18 91.54,62.23 JP37.8
A18  (via drill 0.51)
  Top 0.203: 12.95,124.52 12.95,124.97 11.18,126.75 10.54,126.75 v9.27,125.48
  Top 0.254: 12.95,124.52 | 12.95,124.52 U14.28
  Bottom 0.203: v9.27,125.48 9.53,125.22 9.53,121.79 JP57.2
A19
  Top 0.254: JP57.1 11.05,123.74 | 11.05,123.74 | 11.05,123.74 U14.27
A20
  Top 0.254: 8.13,121.95 JP55.5 8.13,121.95 | U14.26 8.13,121.95
A21
  Top 0.254: U14.25 9.25,124.21 JP55.6
A22
  Top 0.254: U14.24 10.14,128.4 9.47,128.4 8.13,127.05 JP55.7
A23
  Top 0.254: JP64.2 37.72,125.48 | 37.72,125.48 U16.E | U14.23 10.38,129.29 JP55.8 | R39.2 38.23,128.02 37.72,127.51 37.72,125.48
  Bottom 0.203: JP64.2 U$38.P$2 28.45,125.48 27.56,126.36 27.56,131.7 27.01,132.25 U$37.P$3 24.79,132.25 23.94,133.1
  Bottom 0.254: 23.94,133.1 20.7,133.1 19.68,132.08 17.65,132.08 17.14,132.59 17.14,132.97 16.13,133.99 15.47,133.99 14.73,133.25 14.73,132.23 11.79,129.29 JP55.8
A24  (via drill 0.51)
  Top 0.203: 52.83,124.52 52.83,124.97 51.05,126.75 50.42,126.75 v49.15,125.48
  Top 0.254: 52.83,124.52 | 52.83,124.52 U18.28
  Bottom 0.203: v49.15,125.48 49.4,125.22 49.4,121.79 JP75.2
A25
  Top 0.254: JP75.1 50.93,123.74 | 50.93,123.74 | 50.93,123.74 U18.27
A26
  Top 0.254: 48.01,121.95 JP73.5 48.01,121.95 | U18.26 48.01,121.95
A27
  Top 0.254: U18.25 49.13,124.21 JP73.6
A28
  Top 0.254: U18.24 50.02,128.4 49.35,128.4 48.01,127.05 JP73.7
A29
  Top 0.254: JP82.2 77.6,125.48 | 77.6,125.48 U20.E | U18.23 50.26,129.29 JP73.8 | R49.2 78.11,128.02 77.6,127.51 77.6,125.48
  Bottom 0.203: JP82.2 U$48.P$2 68.33,125.48 67.44,126.36 67.44,131.7 66.89,132.25 U$47.P$3 64.67,132.25 63.82,133.1
  Bottom 0.254: 63.82,133.1 60.58,133.1 59.56,132.08 57.53,132.08 57.02,132.59 57.02,132.97 56.01,133.99 55.35,133.99 54.61,133.25 54.61,132.23 51.66,129.29 JP73.8
A30  (via drill 0.51)
  Top 0.203: 92.71,124.52 92.71,124.97 90.93,126.75 90.3,126.75 v89.03,125.48
  Top 0.254: 92.71,124.52 | 92.71,124.52 U22.28
  Bottom 0.203: v89.03,125.48 89.28,125.22 89.28,121.79 JP93.2
A31
  Top 0.254: JP93.1 90.81,123.74 | 90.81,123.74 | 90.81,123.74 U22.27
A32
  Top 0.254: 87.88,121.95 JP91.5 87.88,121.95 | U22.26 87.88,121.95
A33
  Top 0.254: U22.25 89,124.21 JP91.6
A34
  Top 0.254: U22.24 89.89,128.4 89.23,128.4 87.88,127.05 JP91.7
A35
  Top 0.254: JP100.2 117.47,125.48 | 117.47,125.48 U24.E | U22.23 90.14,129.29 JP91.8 | R59.2 117.98,128.02 117.47,127.51 117.47,125.48
  Bottom 0.203: JP100.2 U$58.P$2 108.2,125.48 107.31,126.36 107.31,131.7 106.77,132.25 U$57.P$3 104.55,132.25 103.7,133.1
  Bottom 0.254: 103.7,133.1 100.46,133.1 99.44,132.08 97.41,132.08 96.9,132.59 96.9,132.97 95.89,133.99 95.22,133.99 94.49,133.25 94.49,132.23 91.54,129.29 JP91.8
AREF
  Top 0.254: U1.20 12.06,63.94 C1.2
AREF1
  Top 0.254: U6.20 51.94,63.94 C11.2
AREF2
  Top 0.254: U10.20 91.82,63.94 C22.2
AREF3
  Top 0.254: U14.20 12.06,131 C31.2
AREF4
  Top 0.254: U18.20 51.94,131 C40.2
AREF5
  Top 0.254: U22.20 91.82,131 C49.2
CTS
  Top 0.254: U3.11 11.82,23.12 12.19,23.5 12.19,26.8 13.08,27.69 13.08,29.08 JP3.2
CTS1
  Top 0.254: U7.11 51.7,23.12 52.07,23.5 52.07,26.8 52.96,27.69 52.96,29.08 JP23.2
CTS2
  Top 0.254: U11.11 91.58,23.12 91.95,23.5 91.95,26.8 92.84,27.69 92.84,29.08 JP41.2
CTS3
  Top 0.254: U15.11 11.82,90.18 12.19,90.55 12.19,93.85 13.08,94.74 13.08,96.14 JP59.2
CTS4
  Top 0.254: U19.11 51.7,90.18 52.07,90.55 52.07,93.85 52.96,94.74 52.96,96.14 JP77.2
CTS5
  Top 0.254: U23.11 91.58,90.18 91.95,90.55 91.95,93.85 92.84,94.74 92.84,96.14 JP95.2
D1
  Top 0.254: JP19.1 61.92,71.07 61.92,69.32 61.47,68.86 61.47,67.16 60.96,66.65 60.96,65.59 U6.13
D2  (via drill 0.51)
  Top 0.254: SG1.+ 38.61,31.75 37.34,30.48 33.53,30.48 JP9.2 | U1.32 15.39,53.98 v15.75,53.98
  Bottom 0.203: JP9.2 31.41,30.9 U$7.P$1 28.28,30.9 27.18,32 27.18,39.62 27.69,40.13 27.69,51.05 26.42,52.32 26.42,53.47 26.12,53.76 U$14.P$3 24.22,53.76 JP7.8
  Bottom 0.254: v15.75,53.98 22.73,53.98 JP7.8
D3  (via drill 0.51)
  Top 0.254: JP8.3 34.8,44.45 37.34,41.91 R4.1 | 15.11,56.37 v15.11,56.77 15.11,56.37 | U1.1 15.11,56.37
  Bottom 0.203: JP8.3 31.41,45.3 U$8.P$2 28.99,45.3 28.19,46.1 28.19,51.18 26.92,52.45 26.92,53.85 26.18,54.6 U$14.P$4 24.78,54.6 24.64,54.74 24.64,55.24 23.37,56.52 JP7.7
  Bottom 0.254: v15.11,56.77 15.11,57.28 15.49,57.66 22.86,57.66 JP7.7
D4  (via drill 0.51)
  Top 0.254: v15.49,58.55 15.49,58.04 16,57.53 16,56.39 16.51,55.88 16.73,55.88 U1.2
  Bottom 0.254: JP7.6 22.1,58.42 15.62,58.42 v15.49,58.55
D5
  Top 0.254: U1.9 22.25,62.23 JP7.5 | R7.1 JP8.1
  Bottom 0.203: JP8.1 32.26,48.9 33.53,47.62 33.53,46.35 32.89,45.72 31.62,45.72 31.2,46.14 U$8.P$3 29.3,46.14 28.7,46.74 28.7,51.31 27.43,52.58 27.43,54.48 26.54,55.37 26.54,63.25 26.29,63.5 25.29,63.5 U$13.P$1 24.02,63.51 23.37,62.87 JP7.5
D6
  Top 0.254: JP7.4 23.37,64.48 U1.10 | JP8.2 33.53,45.72 41.15,45.72 42,44.87 R5.1
  Bottom 0.203: JP8.2 32.24,46.98 U$8.P$4 29.35,46.98 29.21,47.12 29.21,51.44 27.94,52.7 27.94,54.61 27.05,55.5 27.05,63.63 26.33,64.35 U$13.P$2 23.79,64.35 JP7.4 23.67,64.47
D7
  Top 0.203: 34.8,72.39 34.86,72.33
  Top 0.254: 22.1,64.34 22.1,66.04 JP7.3 | JP21.3 34.8,72.39 36.07,72.39 | 36.07,72.39 37.34,72.39 37.97,71.75 S2.1 S2.2 | 22.1,64.34 | 22.1,64.34 U1.11 | R9.1 36.13,72.33 36.07,72.39
  Bottom 0.203: JP7.3 24.65,66.03 U$13.P$4 26.18,66.03 26.95,66.8 26.95,69.49 28.18,70.73 U$2.P$3 31.05,70.73 32.26,71.93 JP21.3
D8
  Top 0.254: JP7.2 22.1,68.58 22.1,66.93 21.59,66.42 21.59,64.97 | 21.59,64.97 | 21.59,64.97 U1.12
D9
  Top 0.254: JP7.1 22.05,71.07 22.05,69.32 21.59,68.86 21.59,67.16 21.08,66.65 21.08,65.59 U1.13
D10  (via drill 0.51)
  Top 0.254: v20.83,72.39 21.57,71.65 21.57,69.57 21.08,69.09 21.08,67.39 20.57,66.88 20.57,65.91 19.3,64.64 19,64.64 U1.14
  Bottom 0.254: v20.83,72.39 JP6.12
D11
  Top 0.254: JP19.2 61.98,68.58 61.98,66.93 61.47,66.42 61.47,64.97 | 61.47,64.97 | 61.47,64.97 U6.12
D12  (via drill 0.51)